# EAGLE board SparkFun_Transceiver_Breakout_RPSMA_Panel_v11 (EAGLE 7.4.0), part 1 of 2
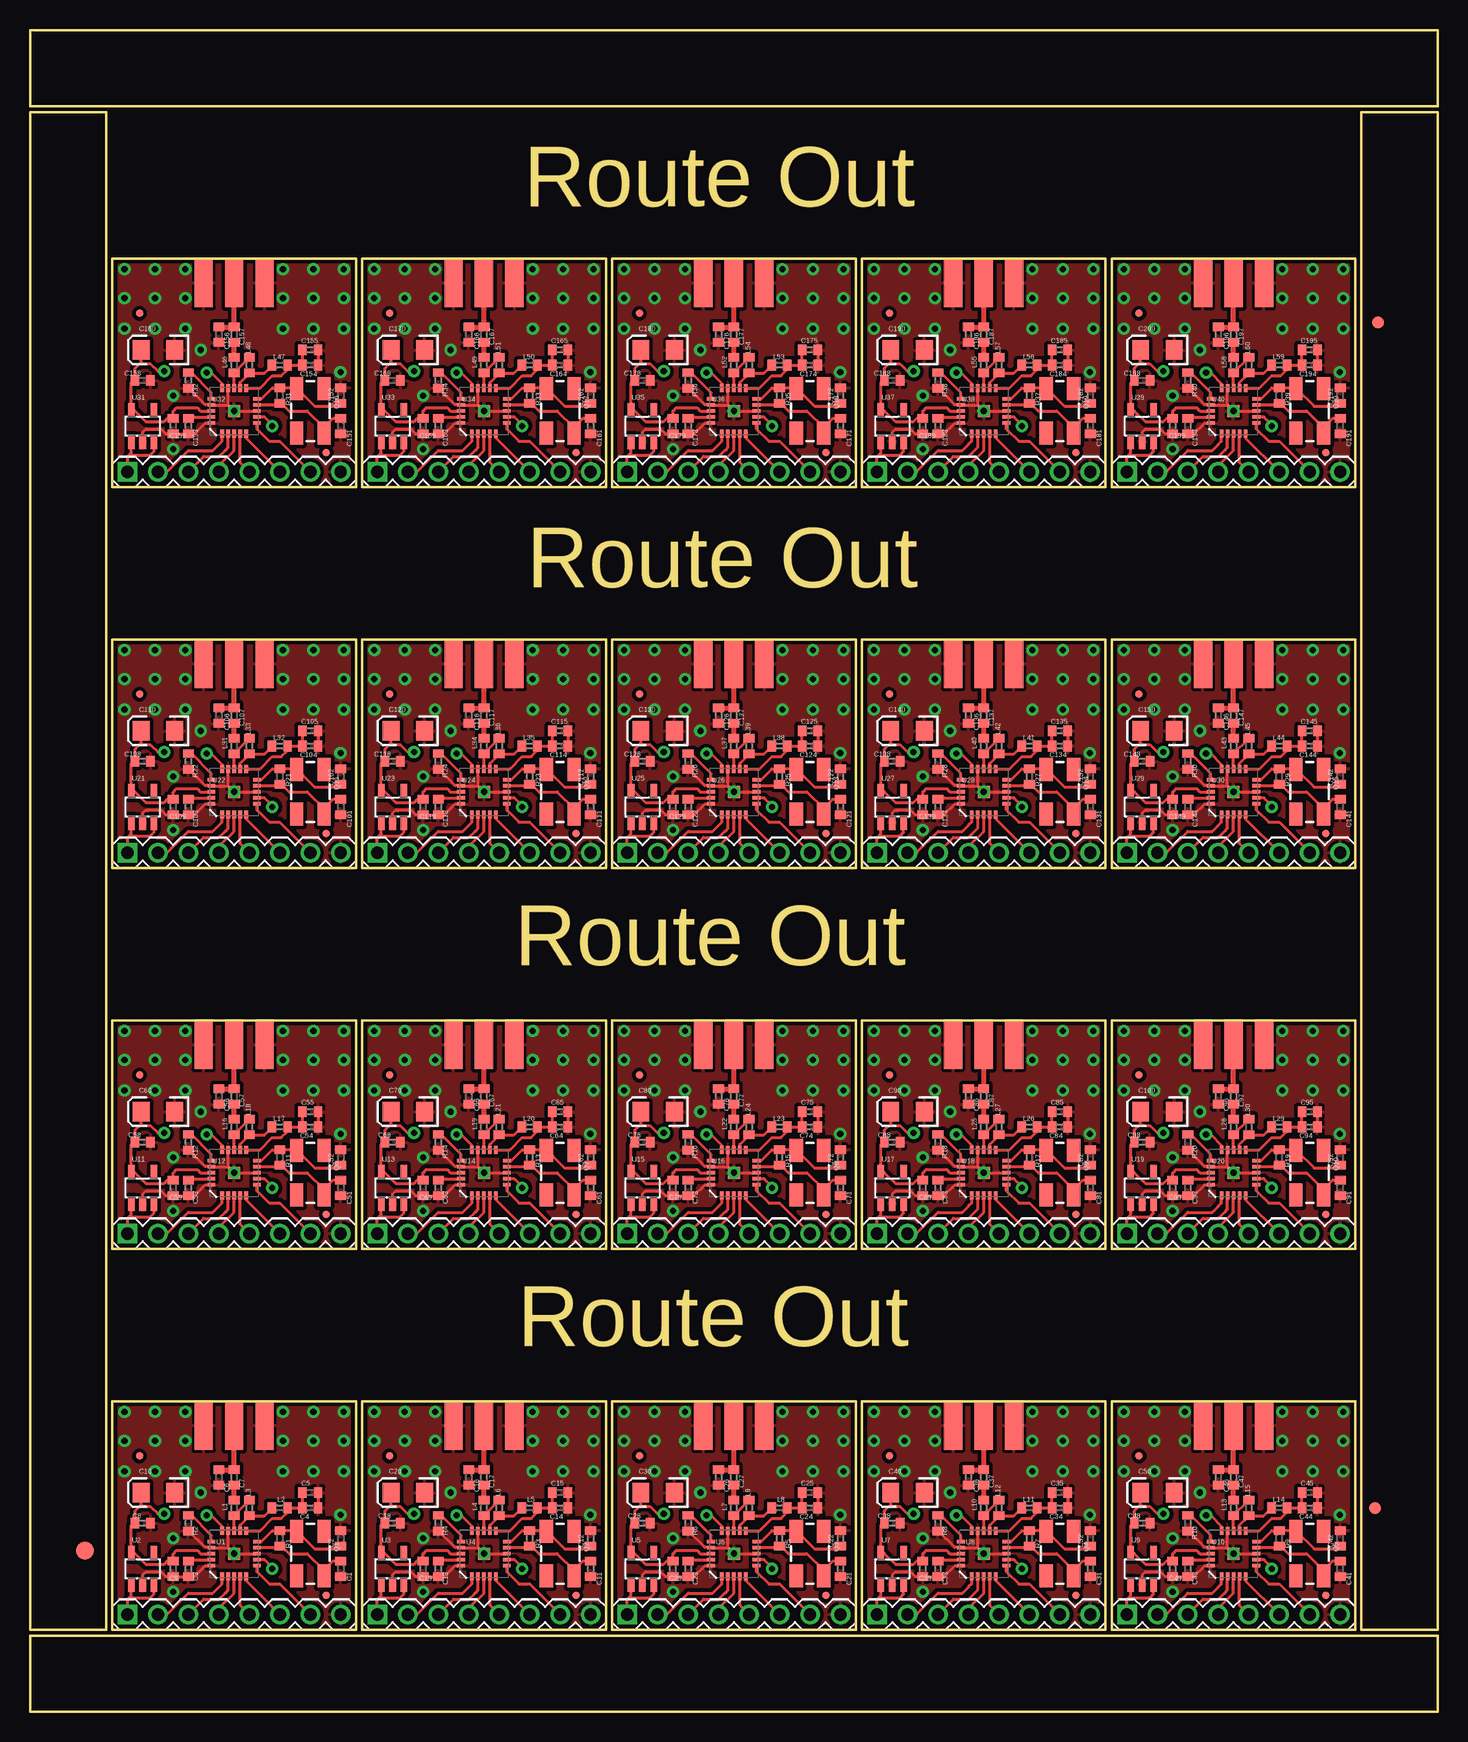
[diagram p0: board, top side]
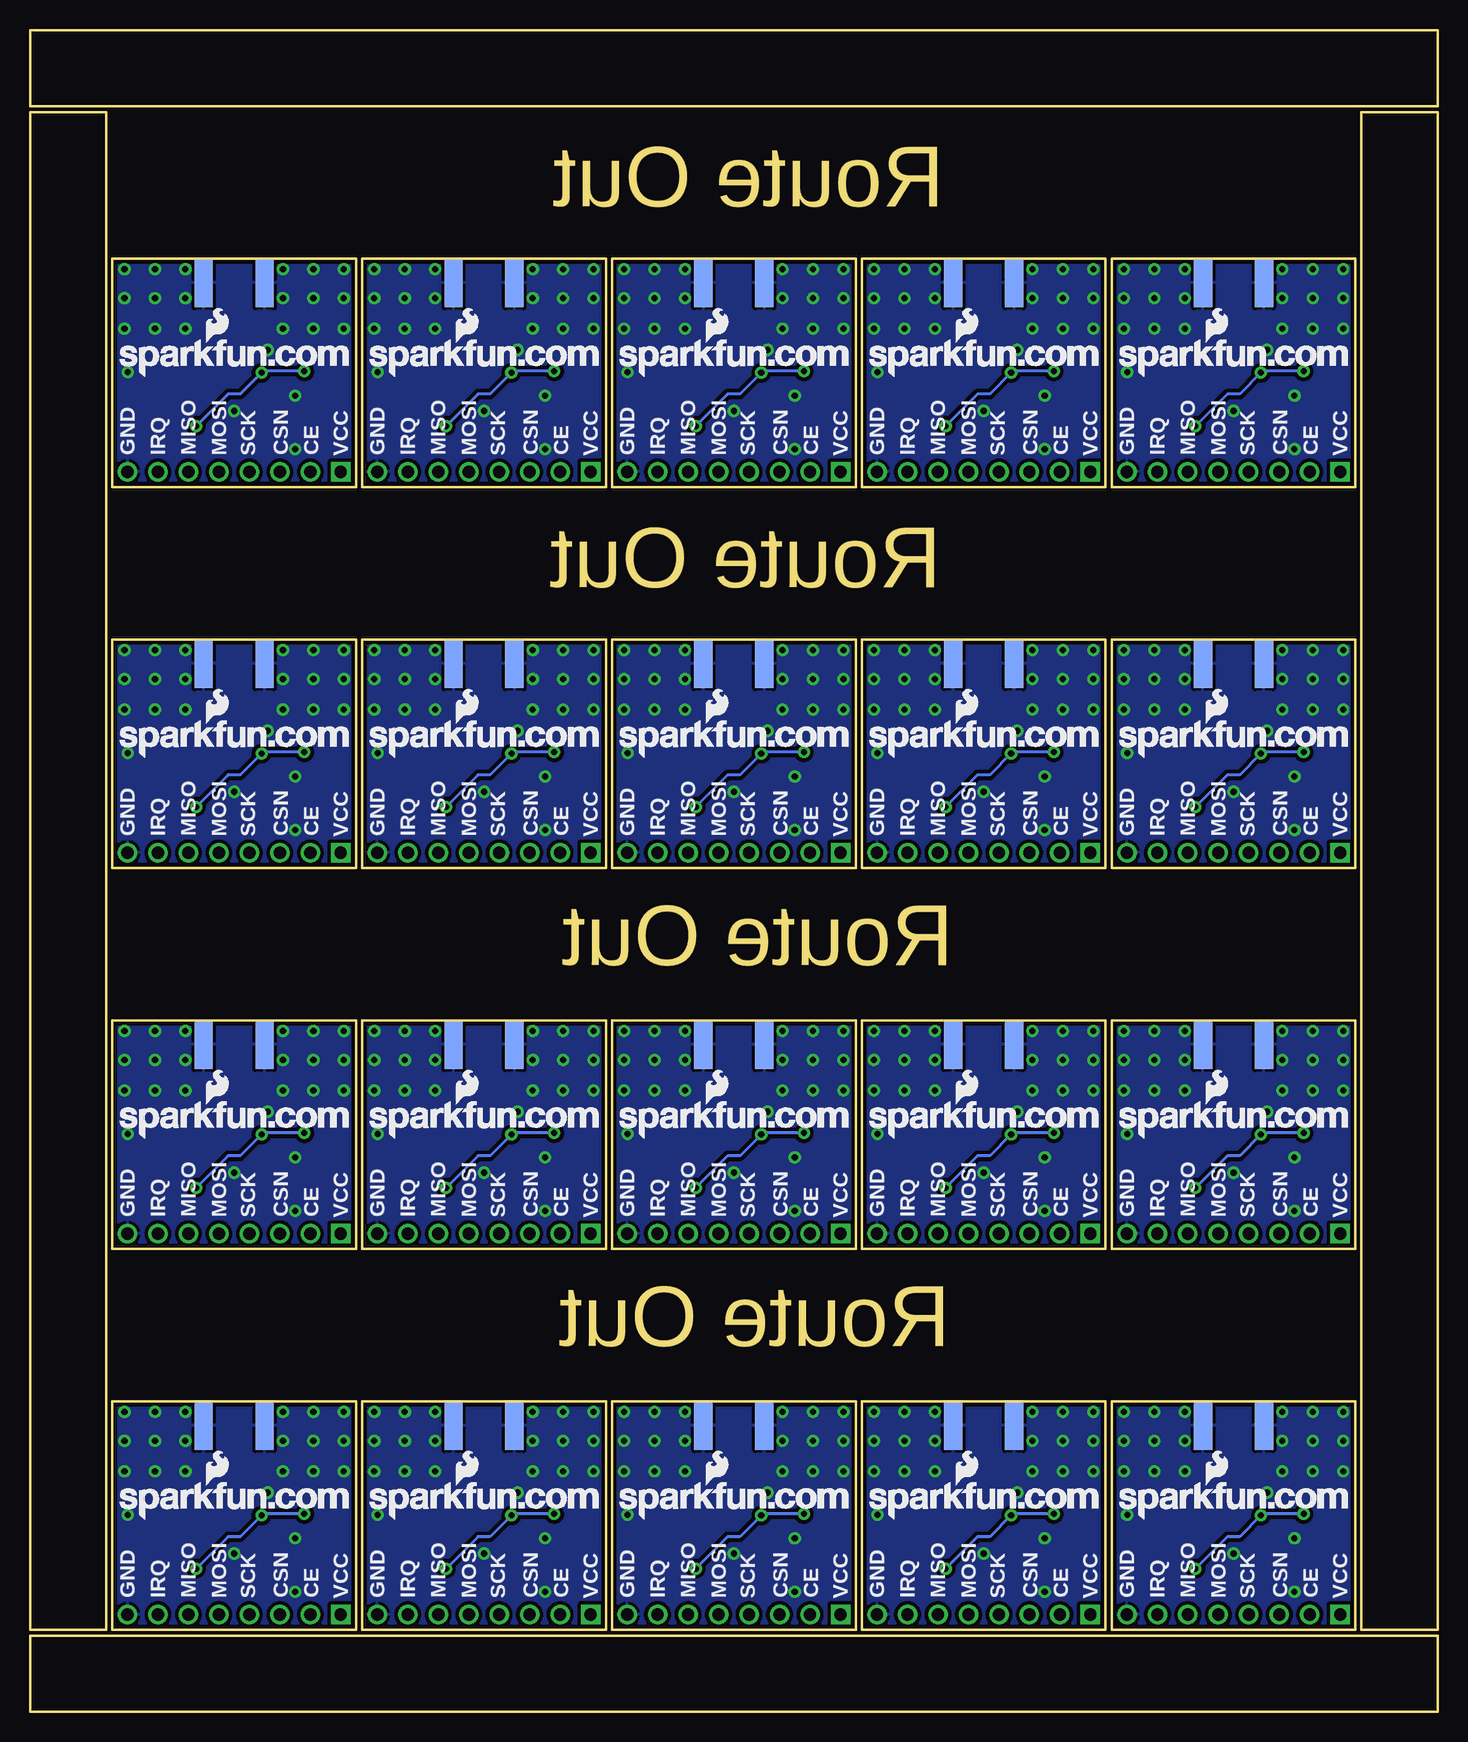
[diagram p1: board, bottom side, seen from below]

Size 117.35 x 140.21 mm. Coordinates in mm from the lower left corner, seen from the top.
Outline: 6.35,79.25 6.35,6.86 0,6.86 0,29.72
Outline: 0,27.18 0,133.35 6.35,133.35 6.35,76.71
Outline: 79.25,0 0,0 0,6.35 29.72,6.35
Outline: 27.18,6.35 117.35,6.35 117.35,0 76.71,0
Outline: 117.35,79.25 117.35,6.86 111,6.86 111,29.72
Outline: 111,27.18 111,133.35 117.35,133.35 117.35,76.71
Outline: 37.34,140.21 117.35,140.21 117.35,133.86 86.87,133.86
Outline: 89.41,133.86 0,133.86 0,140.21 39.88,140.21
Outline: 6.86,6.86 27.18,6.86 27.18,25.91 6.86,25.91 6.86,6.86
Outline: 27.69,6.86 48.01,6.86 48.01,25.91 27.69,25.91 27.69,6.86
Outline: 48.51,6.86 68.83,6.86 68.83,25.91 48.51,25.91 48.51,6.86
Outline: 69.34,6.86 89.66,6.86 89.66,25.91 69.34,25.91 69.34,6.86
Outline: 90.17,6.86 110.49,6.86 110.49,25.91 90.17,25.91 90.17,6.86
Outline: 6.86,38.61 27.18,38.61 27.18,57.66 6.86,57.66 6.86,38.61
Outline: 27.69,38.61 48.01,38.61 48.01,57.66 27.69,57.66 27.69,38.61
Outline: 48.51,38.61 68.83,38.61 68.83,57.66 48.51,57.66 48.51,38.61
Outline: 69.34,38.61 89.66,38.61 89.66,57.66 69.34,57.66 69.34,38.61
Outline: 90.17,38.61 110.49,38.61 110.49,57.66 90.17,57.66 90.17,38.61
Outline: 6.86,70.36 27.18,70.36 27.18,89.41 6.86,89.41 6.86,70.36
Outline: 27.69,70.36 48.01,70.36 48.01,89.41 27.69,89.41 27.69,70.36
Outline: 48.51,70.36 68.83,70.36 68.83,89.41 48.51,89.41 48.51,70.36
Outline: 69.34,70.36 89.66,70.36 89.66,89.41 69.34,89.41 69.34,70.36
Outline: 90.17,70.36 110.49,70.36 110.49,89.41 90.17,89.41 90.17,70.36
Outline: 6.86,102.11 27.18,102.11 27.18,121.16 6.86,121.16 6.86,102.11
Outline: 27.69,102.11 48.01,102.11 48.01,121.16 27.69,121.16 27.69,102.11
Outline: 48.51,102.11 68.83,102.11 68.83,121.16 48.51,121.16 48.51,102.11
Outline: 69.34,102.11 89.66,102.11 89.66,121.16 69.34,121.16 69.34,102.11
Outline: 90.17,102.11 110.49,102.11 110.49,121.16 90.17,121.16 90.17,102.11
Copper layers (1*16): Top 0.035mm / dielectric 1.5mm / Bottom 0.035mm
Design rules "SparkFun *": minimum track width 8mil, minimum drill 20mil, track to track 8mil, track to pad 8mil, pad to pad 7mil, via to via 8mil, smd to smd 8mil, copper to edge 10mil, drill to drill 8mil, minimum pad ring 12mil, minimum via ring 10mil, stop-mask expansion 4mil, vias tented up to drill 25mil, thermal gap 10mil

## Footprints (pad centres in the part's own frame; a part is rotated, then mirrored left to right if it is on the bottom)
C0402 = smd 0.7 x 0.9: 1 -0.65,0; 2 0.65,0
EIA3216 = smd 1.4 x 1.6: A 1.4,0; C -1.4,0
FIDUCIAL-1.5X3 = smd 1.5 x 1.5: 1 0,0
FIDUCIAL-1X2 = smd 1 x 1: 1 0,0
MICRO-FIDUCIAL = smd 0.635 x 0.635: 1 0,0
SMA-EDGE = smd 1.524 x 4.064: GND@0 0,0; GND@1 5.08,0; SIG 2.54,0 | smd 1.524 x 4.064 bottom: GND@2 0,0; GND@3 5.08,0
1X08 = drill 1.016 square: 1 0,0 | drill 1.016: 2 2.54,0; 3 5.08,0; 4 7.62,0; 5 10.16,0; 6 12.7,0; 7 15.24,0; 8 17.78,0
CRYSTAL-SMD-5X3 = smd 1.9 x 1.1: 1 -1.85,-1.15; 2 1.85,-1.15; 3 1.85,1.15; 4 -1.85,1.15
QFN20 = smd 1 x 1: 0 0,0 | smd 0.65 x 0.3: 1 -1.9,1; 2 -1.9,0.5; 3 -1.9,0; 4 -1.9,-0.5; 5 -1.9,-1; 11 1.9,-1; 12 1.9,-0.5; 13 1.9,0; 14 1.9,0.5; 15 1.9,1 | smd 0.3 x 0.65: 6 -1,-1.9; 7 -0.5,-1.9; 8 0,-1.9; 9 0.5,-1.9; 10 1,-1.9; 16 1,1.9; 17 0.5,1.9; 18 0,1.9; 19 -0.5,1.9; 20 -1,1.9
SOT23-5 = smd 0.55 x 1.2: 1 -0.95,-1.3; 2 0,-1.3; 3 0.95,-1.3; 4 0.95,1.3; 5 -0.95,1.3

## Placement (x,y rotation side)
C1  22pF  [C0402]  25.91,11.94 270 top
C2  22pF  [C0402]  25.91,14.48 90 top
C3  33nF  [C0402]  13.21,11.94 270 top
C4  2.2nF  [C0402]  23.37,17.02 0 top
C5  4.7pF  [C0402]  23.37,18.29 0 top
C6  1.0pF  [C0402]  15.75,19.56 90 top
C7  1.5pF  [C0402]  17.02,19.56 90 top
C8  10nF  [C0402]  9.4,15.75 180 top
C9  1nF  [C0402]  11.94,11.94 90 top
C10  10uF  [EIA3216]  10.67,18.29 180 top
C11  22pF  [C0402]  46.74,11.94 270 top
C12  22pF  [C0402]  46.74,14.48 90 top
C13  33nF  [C0402]  34.04,11.94 270 top
C14  2.2nF  [C0402]  44.2,17.02 0 top
C15  4.7pF  [C0402]  44.2,18.29 0 top
C16  1.0pF  [C0402]  36.58,19.56 90 top
C17  1.5pF  [C0402]  37.85,19.56 90 top
C18  10nF  [C0402]  30.23,15.75 180 top
C19  1nF  [C0402]  32.77,11.94 90 top
C20  10uF  [EIA3216]  31.5,18.29 180 top
C21  22pF  [C0402]  67.56,11.94 270 top
C22  22pF  [C0402]  67.56,14.48 90 top
C23  33nF  [C0402]  54.86,11.94 270 top
C24  2.2nF  [C0402]  65.02,17.02 0 top
C25  4.7pF  [C0402]  65.02,18.29 0 top
C26  1.0pF  [C0402]  57.4,19.56 90 top
C27  1.5pF  [C0402]  58.67,19.56 90 top
C28  10nF  [C0402]  51.05,15.75 180 top
C29  1nF  [C0402]  53.59,11.94 90 top
C30  10uF  [EIA3216]  52.32,18.29 180 top
C31  22pF  [C0402]  88.39,11.94 270 top
C32  22pF  [C0402]  88.39,14.48 90 top
C33  33nF  [C0402]  75.69,11.94 270 top
C34  2.2nF  [C0402]  85.85,17.02 0 top
C35  4.7pF  [C0402]  85.85,18.29 0 top
C36  1.0pF  [C0402]  78.23,19.56 90 top
C37  1.5pF  [C0402]  79.5,19.56 90 top
C38  10nF  [C0402]  71.88,15.75 180 top
C39  1nF  [C0402]  74.42,11.94 90 top
C40  10uF  [EIA3216]  73.15,18.29 180 top
C41  22pF  [C0402]  109.22,11.94 270 top
C42  22pF  [C0402]  109.22,14.48 90 top
C43  33nF  [C0402]  96.52,11.94 270 top
C44  2.2nF  [C0402]  106.68,17.02 0 top
C45  4.7pF  [C0402]  106.68,18.29 0 top
C46  1.0pF  [C0402]  99.06,19.56 90 top
C47  1.5pF  [C0402]  100.33,19.56 90 top
C48  10nF  [C0402]  92.71,15.75 180 top
C49  1nF  [C0402]  95.25,11.94 90 top
C50  10uF  [EIA3216]  93.98,18.29 180 top
C51  22pF  [C0402]  25.91,43.69 270 top
C52  22pF  [C0402]  25.91,46.23 90 top
C53  33nF  [C0402]  13.21,43.69 270 top
C54  2.2nF  [C0402]  23.37,48.77 0 top
C55  4.7pF  [C0402]  23.37,50.04 0 top
C56  1.0pF  [C0402]  15.75,51.31 90 top
C57  1.5pF  [C0402]  17.02,51.31 90 top
C58  10nF  [C0402]  9.4,47.5 180 top
C59  1nF  [C0402]  11.94,43.69 90 top
C60  10uF  [EIA3216]  10.67,50.04 180 top
C61  22pF  [C0402]  46.74,43.69 270 top
C62  22pF  [C0402]  46.74,46.23 90 top
C63  33nF  [C0402]  34.04,43.69 270 top
C64  2.2nF  [C0402]  44.2,48.77 0 top
C65  4.7pF  [C0402]  44.2,50.04 0 top
C66  1.0pF  [C0402]  36.58,51.31 90 top
C67  1.5pF  [C0402]  37.85,51.31 90 top
C68  10nF  [C0402]  30.23,47.5 180 top
C69  1nF  [C0402]  32.77,43.69 90 top
C70  10uF  [EIA3216]  31.5,50.04 180 top
C71  22pF  [C0402]  67.56,43.69 270 top
C72  22pF  [C0402]  67.56,46.23 90 top
C73  33nF  [C0402]  54.86,43.69 270 top
C74  2.2nF  [C0402]  65.02,48.77 0 top
C75  4.7pF  [C0402]  65.02,50.04 0 top
C76  1.0pF  [C0402]  57.4,51.31 90 top
C77  1.5pF  [C0402]  58.67,51.31 90 top
C78  10nF  [C0402]  51.05,47.5 180 top
C79  1nF  [C0402]  53.59,43.69 90 top
C80  10uF  [EIA3216]  52.32,50.04 180 top
C81  22pF  [C0402]  88.39,43.69 270 top
C82  22pF  [C0402]  88.39,46.23 90 top
C83  33nF  [C0402]  75.69,43.69 270 top
C84  2.2nF  [C0402]  85.85,48.77 0 top
C85  4.7pF  [C0402]  85.85,50.04 0 top
C86  1.0pF  [C0402]  78.23,51.31 90 top
C87  1.5pF  [C0402]  79.5,51.31 90 top
C88  10nF  [C0402]  71.88,47.5 180 top
C89  1nF  [C0402]  74.42,43.69 90 top
C90  10uF  [EIA3216]  73.15,50.04 180 top
C91  22pF  [C0402]  109.22,43.69 270 top
C92  22pF  [C0402]  109.22,46.23 90 top
C93  33nF  [C0402]  96.52,43.69 270 top
C94  2.2nF  [C0402]  106.68,48.77 0 top
C95  4.7pF  [C0402]  106.68,50.04 0 top
C96  1.0pF  [C0402]  99.06,51.31 90 top
C97  1.5pF  [C0402]  100.33,51.31 90 top
C98  10nF  [C0402]  92.71,47.5 180 top
C99  1nF  [C0402]  95.25,43.69 90 top
C100  10uF  [EIA3216]  93.98,50.04 180 top
C101  22pF  [C0402]  25.91,75.44 270 top
C102  22pF  [C0402]  25.91,77.98 90 top
C103  33nF  [C0402]  13.21,75.44 270 top
C104  2.2nF  [C0402]  23.37,80.52 0 top
C105  4.7pF  [C0402]  23.37,81.79 0 top
C106  1.0pF  [C0402]  15.75,83.06 90 top
C107  1.5pF  [C0402]  17.02,83.06 90 top
C108  10nF  [C0402]  9.4,79.25 180 top
C109  1nF  [C0402]  11.94,75.44 90 top
C110  10uF  [EIA3216]  10.67,81.79 180 top
C111  22pF  [C0402]  46.74,75.44 270 top
C112  22pF  [C0402]  46.74,77.98 90 top
C113  33nF  [C0402]  34.04,75.44 270 top
C114  2.2nF  [C0402]  44.2,80.52 0 top
C115  4.7pF  [C0402]  44.2,81.79 0 top
C116  1.0pF  [C0402]  36.58,83.06 90 top
C117  1.5pF  [C0402]  37.85,83.06 90 top
C118  10nF  [C0402]  30.23,79.25 180 top
C119  1nF  [C0402]  32.77,75.44 90 top
C120  10uF  [EIA3216]  31.5,81.79 180 top
C121  22pF  [C0402]  67.56,75.44 270 top
C122  22pF  [C0402]  67.56,77.98 90 top
C123  33nF  [C0402]  54.86,75.44 270 top
C124  2.2nF  [C0402]  65.02,80.52 0 top
C125  4.7pF  [C0402]  65.02,81.79 0 top
C126  1.0pF  [C0402]  57.4,83.06 90 top
C127  1.5pF  [C0402]  58.67,83.06 90 top
C128  10nF  [C0402]  51.05,79.25 180 top
C129  1nF  [C0402]  53.59,75.44 90 top
C130  10uF  [EIA3216]  52.32,81.79 180 top
C131  22pF  [C0402]  88.39,75.44 270 top
C132  22pF  [C0402]  88.39,77.98 90 top
C133  33nF  [C0402]  75.69,75.44 270 top
C134  2.2nF  [C0402]  85.85,80.52 0 top
C135  4.7pF  [C0402]  85.85,81.79 0 top
C136  1.0pF  [C0402]  78.23,83.06 90 top
C137  1.5pF  [C0402]  79.5,83.06 90 top
C138  10nF  [C0402]  71.88,79.25 180 top
C139  1nF  [C0402]  74.42,75.44 90 top
C140  10uF  [EIA3216]  73.15,81.79 180 top
C141  22pF  [C0402]  109.22,75.44 270 top
C142  22pF  [C0402]  109.22,77.98 90 top
C143  33nF  [C0402]  96.52,75.44 270 top
C144  2.2nF  [C0402]  106.68,80.52 0 top
C145  4.7pF  [C0402]  106.68,81.79 0 top
C146  1.0pF  [C0402]  99.06,83.06 90 top
C147  1.5pF  [C0402]  100.33,83.06 90 top
C148  10nF  [C0402]  92.71,79.25 180 top
C149  1nF  [C0402]  95.25,75.44 90 top
C150  10uF  [EIA3216]  93.98,81.79 180 top
C151  22pF  [C0402]  25.91,107.19 270 top
C152  22pF  [C0402]  25.91,109.73 90 top
C153  33nF  [C0402]  13.21,107.19 270 top
C154  2.2nF  [C0402]  23.37,112.27 0 top
C155  4.7pF  [C0402]  23.37,113.54 0 top
C156  1.0pF  [C0402]  15.75,114.81 90 top
C157  1.5pF  [C0402]  17.02,114.81 90 top
C158  10nF  [C0402]  9.4,111 180 top
C159  1nF  [C0402]  11.94,107.19 90 top
C160  10uF  [EIA3216]  10.67,113.54 180 top
C161  22pF  [C0402]  46.74,107.19 270 top
C162  22pF  [C0402]  46.74,109.73 90 top
C163  33nF  [C0402]  34.04,107.19 270 top
C164  2.2nF  [C0402]  44.2,112.27 0 top
C165  4.7pF  [C0402]  44.2,113.54 0 top
C166  1.0pF  [C0402]  36.58,114.81 90 top
C167  1.5pF  [C0402]  37.85,114.81 90 top
C168  10nF  [C0402]  30.23,111 180 top
C169  1nF  [C0402]  32.77,107.19 90 top
C170  10uF  [EIA3216]  31.5,113.54 180 top
C171  22pF  [C0402]  67.56,107.19 270 top
C172  22pF  [C0402]  67.56,109.73 90 top
C173  33nF  [C0402]  54.86,107.19 270 top
C174  2.2nF  [C0402]  65.02,112.27 0 top
C175  4.7pF  [C0402]  65.02,113.54 0 top
C176  1.0pF  [C0402]  57.4,114.81 90 top
C177  1.5pF  [C0402]  58.67,114.81 90 top
C178  10nF  [C0402]  51.05,111 180 top
C179  1nF  [C0402]  53.59,107.19 90 top
C180  10uF  [EIA3216]  52.32,113.54 180 top
C181  22pF  [C0402]  88.39,107.19 270 top
C182  22pF  [C0402]  88.39,109.73 90 top
C183  33nF  [C0402]  75.69,107.19 270 top
C184  2.2nF  [C0402]  85.85,112.27 0 top
C185  4.7pF  [C0402]  85.85,113.54 0 top
C186  1.0pF  [C0402]  78.23,114.81 90 top
C187  1.5pF  [C0402]  79.5,114.81 90 top
C188  10nF  [C0402]  71.88,111 180 top
C189  1nF  [C0402]  74.42,107.19 90 top
C190  10uF  [EIA3216]  73.15,113.54 180 top
C191  22pF  [C0402]  109.22,107.19 270 top
C192  22pF  [C0402]  109.22,109.73 90 top
C193  33nF  [C0402]  96.52,107.19 270 top
C194  2.2nF  [C0402]  106.68,112.27 0 top
C195  4.7pF  [C0402]  106.68,113.54 0 top
C196  1.0pF  [C0402]  99.06,114.81 90 top
C197  1.5pF  [C0402]  100.33,114.81 90 top
C198  10nF  [C0402]  92.71,111 180 top
C199  1nF  [C0402]  95.25,107.19 90 top
C200  10uF  [EIA3216]  93.98,113.54 180 top
E$1  [FIDUCIAL-1.5X3]  4.57,13.46 0 top
E$5  [FIDUCIAL-1X2]  112.14,17.02 0 top
E$6  [FIDUCIAL-1X2]  112.39,115.82 180 top
FID1  FIDUCIALUFIDUCIAL  [MICRO-FIDUCIAL]  24.69,9.73 0 top
FID2  FIDUCIALUFIDUCIAL  [MICRO-FIDUCIAL]  9.14,21.34 0 top
FID3  FIDUCIALUFIDUCIAL  [MICRO-FIDUCIAL]  45.52,9.73 0 top
FID4  FIDUCIALUFIDUCIAL  [MICRO-FIDUCIAL]  29.97,21.34 0 top
FID5  FIDUCIALUFIDUCIAL  [MICRO-FIDUCIAL]  66.34,9.73 0 top
FID6  FIDUCIALUFIDUCIAL  [MICRO-FIDUCIAL]  50.8,21.34 0 top
FID7  FIDUCIALUFIDUCIAL  [MICRO-FIDUCIAL]  87.17,9.73 0 top
FID8  FIDUCIALUFIDUCIAL  [MICRO-FIDUCIAL]  71.63,21.34 0 top
FID9  FIDUCIALUFIDUCIAL  [MICRO-FIDUCIAL]  108,9.73 0 top
FID10  FIDUCIALUFIDUCIAL  [MICRO-FIDUCIAL]  92.46,21.34 0 top
FID11  FIDUCIALUFIDUCIAL  [MICRO-FIDUCIAL]  24.69,41.48 0 top
FID12  FIDUCIALUFIDUCIAL  [MICRO-FIDUCIAL]  9.14,53.09 0 top
FID13  FIDUCIALUFIDUCIAL  [MICRO-FIDUCIAL]  45.52,41.48 0 top
FID14  FIDUCIALUFIDUCIAL  [MICRO-FIDUCIAL]  29.97,53.09 0 top
FID15  FIDUCIALUFIDUCIAL  [MICRO-FIDUCIAL]  66.34,41.48 0 top
FID16  FIDUCIALUFIDUCIAL  [MICRO-FIDUCIAL]  50.8,53.09 0 top
FID17  FIDUCIALUFIDUCIAL  [MICRO-FIDUCIAL]  87.17,41.48 0 top
FID18  FIDUCIALUFIDUCIAL  [MICRO-FIDUCIAL]  71.63,53.09 0 top
FID19  FIDUCIALUFIDUCIAL  [MICRO-FIDUCIAL]  108,41.48 0 top
FID20  FIDUCIALUFIDUCIAL  [MICRO-FIDUCIAL]  92.46,53.09 0 top
FID21  FIDUCIALUFIDUCIAL  [MICRO-FIDUCIAL]  24.69,73.23 0 top
FID22  FIDUCIALUFIDUCIAL  [MICRO-FIDUCIAL]  9.14,84.84 0 top
FID23  FIDUCIALUFIDUCIAL  [MICRO-FIDUCIAL]  45.52,73.23 0 top
FID24  FIDUCIALUFIDUCIAL  [MICRO-FIDUCIAL]  29.97,84.84 0 top
FID25  FIDUCIALUFIDUCIAL  [MICRO-FIDUCIAL]  66.34,73.23 0 top
FID26  FIDUCIALUFIDUCIAL  [MICRO-FIDUCIAL]  50.8,84.84 0 top
FID27  FIDUCIALUFIDUCIAL  [MICRO-FIDUCIAL]  87.17,73.23 0 top
FID28  FIDUCIALUFIDUCIAL  [MICRO-FIDUCIAL]  71.63,84.84 0 top
FID29  FIDUCIALUFIDUCIAL  [MICRO-FIDUCIAL]  108,73.23 0 top
FID30  FIDUCIALUFIDUCIAL  [MICRO-FIDUCIAL]  92.46,84.84 0 top
FID31  FIDUCIALUFIDUCIAL  [MICRO-FIDUCIAL]  24.69,104.98 0 top
FID32  FIDUCIALUFIDUCIAL  [MICRO-FIDUCIAL]  9.14,116.59 0 top
FID33  FIDUCIALUFIDUCIAL  [MICRO-FIDUCIAL]  45.52,104.98 0 top
FID34  FIDUCIALUFIDUCIAL  [MICRO-FIDUCIAL]  29.97,116.59 0 top
FID35  FIDUCIALUFIDUCIAL  [MICRO-FIDUCIAL]  66.34,104.98 0 top
FID36  FIDUCIALUFIDUCIAL  [MICRO-FIDUCIAL]  50.8,116.59 0 top
FID37  FIDUCIALUFIDUCIAL  [MICRO-FIDUCIAL]  87.17,104.98 0 top
FID38  FIDUCIALUFIDUCIAL  [MICRO-FIDUCIAL]  71.63,116.59 0 top
FID39  FIDUCIALUFIDUCIAL  [MICRO-FIDUCIAL]  108,104.98 0 top
FID40  FIDUCIALUFIDUCIAL  [MICRO-FIDUCIAL]  92.46,116.59 0 top
J$1  SMA_EDGE  [SMA-EDGE]  19.56,23.88 180 top
J$2  SMA_EDGE  [SMA-EDGE]  40.39,23.88 180 top
J$3  SMA_EDGE  [SMA-EDGE]  61.21,23.88 180 top
J$4  SMA_EDGE  [SMA-EDGE]  82.04,23.88 180 top
J$5  SMA_EDGE  [SMA-EDGE]  102.87,23.88 180 top
J$6  SMA_EDGE  [SMA-EDGE]  19.56,55.63 180 top
J$7  SMA_EDGE  [SMA-EDGE]  40.39,55.63 180 top
J$8  SMA_EDGE  [SMA-EDGE]  61.21,55.63 180 top
J$9  SMA_EDGE  [SMA-EDGE]  82.04,55.63 180 top
J$10  SMA_EDGE  [SMA-EDGE]  102.87,55.63 180 top
J$11  SMA_EDGE  [SMA-EDGE]  19.56,87.38 180 top
J$12  SMA_EDGE  [SMA-EDGE]  40.39,87.38 180 top
J$13  SMA_EDGE  [SMA-EDGE]  61.21,87.38 180 top
J$14  SMA_EDGE  [SMA-EDGE]  82.04,87.38 180 top
J$15  SMA_EDGE  [SMA-EDGE]  102.87,87.38 180 top
J$16  SMA_EDGE  [SMA-EDGE]  19.56,119.13 180 top
J$17  SMA_EDGE  [SMA-EDGE]  40.39,119.13 180 top
J$18  SMA_EDGE  [SMA-EDGE]  61.21,119.13 180 top
J$19  SMA_EDGE  [SMA-EDGE]  82.04,119.13 180 top
J$20  SMA_EDGE  [SMA-EDGE]  102.87,119.13 180 top
JP1  [1X08]  8.13,8.13 0 top
JP2  [1X08]  28.96,8.13 0 top
JP3  [1X08]  49.78,8.13 0 top
JP4  [1X08]  70.61,8.13 0 top
JP5  [1X08]  91.44,8.13 0 top
JP6  [1X08]  8.13,39.88 0 top
JP7  [1X08]  28.96,39.88 0 top
JP8  [1X08]  49.78,39.88 0 top
JP9  [1X08]  70.61,39.88 0 top
JP10  [1X08]  91.44,39.88 0 top
JP11  [1X08]  8.13,71.63 0 top
JP12  [1X08]  28.96,71.63 0 top
JP13  [1X08]  49.78,71.63 0 top
JP14  [1X08]  70.61,71.63 0 top
JP15  [1X08]  91.44,71.63 0 top
JP16  [1X08]  8.13,103.38 0 top
JP17  [1X08]  28.96,103.38 0 top
JP18  [1X08]  49.78,103.38 0 top
JP19  [1X08]  70.61,103.38 0 top
JP20  [1X08]  91.44,103.38 0 top
L1  3.9nH  [C0402]  17.02,17.02 90 top
L2  2.7nH  [C0402]  20.83,17.02 180 top
L3  8.2nH  [C0402]  18.29,17.02 90 top
L4  3.9nH  [C0402]  37.85,17.02 90 top
L5  2.7nH  [C0402]  41.66,17.02 180 top
L6  8.2nH  [C0402]  39.12,17.02 90 top
L7  3.9nH  [C0402]  58.67,17.02 90 top
L8  2.7nH  [C0402]  62.48,17.02 180 top
L9  8.2nH  [C0402]  59.94,17.02 90 top
L10  3.9nH  [C0402]  79.5,17.02 90 top
L11  2.7nH  [C0402]  83.31,17.02 180 top
L12  8.2nH  [C0402]  80.77,17.02 90 top
L13  3.9nH  [C0402]  100.33,17.02 90 top
L14  2.7nH  [C0402]  104.14,17.02 180 top
L15  8.2nH  [C0402]  101.6,17.02 90 top
L16  3.9nH  [C0402]  17.02,48.77 90 top
L17  2.7nH  [C0402]  20.83,48.77 180 top
L18  8.2nH  [C0402]  18.29,48.77 90 top
L19  3.9nH  [C0402]  37.85,48.77 90 top
L20  2.7nH  [C0402]  41.66,48.77 180 top
L21  8.2nH  [C0402]  39.12,48.77 90 top
L22  3.9nH  [C0402]  58.67,48.77 90 top
L23  2.7nH  [C0402]  62.48,48.77 180 top
L24  8.2nH  [C0402]  59.94,48.77 90 top
L25  3.9nH  [C0402]  79.5,48.77 90 top
L26  2.7nH  [C0402]  83.31,48.77 180 top
L27  8.2nH  [C0402]  80.77,48.77 90 top
L28  3.9nH  [C0402]  100.33,48.77 90 top
L29  2.7nH  [C0402]  104.14,48.77 180 top
L30  8.2nH  [C0402]  101.6,48.77 90 top
L31  3.9nH  [C0402]  17.02,80.52 90 top
L32  2.7nH  [C0402]  20.83,80.52 180 top
L33  8.2nH  [C0402]  18.29,80.52 90 top
L34  3.9nH  [C0402]  37.85,80.52 90 top
L35  2.7nH  [C0402]  41.66,80.52 180 top
L36  8.2nH  [C0402]  39.12,80.52 90 top
L37  3.9nH  [C0402]  58.67,80.52 90 top
L38  2.7nH  [C0402]  62.48,80.52 180 top
L39  8.2nH  [C0402]  59.94,80.52 90 top
L40  3.9nH  [C0402]  79.5,80.52 90 top
L41  2.7nH  [C0402]  83.31,80.52 180 top
L42  8.2nH  [C0402]  80.77,80.52 90 top
L43  3.9nH  [C0402]  100.33,80.52 90 top
L44  2.7nH  [C0402]  104.14,80.52 180 top
L45  8.2nH  [C0402]  101.6,80.52 90 top
L46  3.9nH  [C0402]  17.02,112.27 90 top
L47  2.7nH  [C0402]  20.83,112.27 180 top
L48  8.2nH  [C0402]  18.29,112.27 90 top
L49  3.9nH  [C0402]  37.85,112.27 90 top
L50  2.7nH  [C0402]  41.66,112.27 180 top
L51  8.2nH  [C0402]  39.12,112.27 90 top
L52  3.9nH  [C0402]  58.67,112.27 90 top
L53  2.7nH  [C0402]  62.48,112.27 180 top
L54  8.2nH  [C0402]  59.94,112.27 90 top
L55  3.9nH  [C0402]  79.5,112.27 90 top
L56  2.7nH  [C0402]  83.31,112.27 180 top
L57  8.2nH  [C0402]  80.77,112.27 90 top
L58  3.9nH  [C0402]  100.33,112.27 90 top
L59  2.7nH  [C0402]  104.14,112.27 180 top
L60  8.2nH  [C0402]  101.6,112.27 90 top
Q1  16MHz  [CRYSTAL-SMD-5X3]  23.37,13.21 90 top
Q2  16MHz  [CRYSTAL-SMD-5X3]  44.2,13.21 90 top
Q3  16MHz  [CRYSTAL-SMD-5X3]  65.02,13.21 90 top
Q4  16MHz  [CRYSTAL-SMD-5X3]  85.85,13.21 90 top
Q5  16MHz  [CRYSTAL-SMD-5X3]  106.68,13.21 90 top
Q6  16MHz  [CRYSTAL-SMD-5X3]  23.37,44.96 90 top
Q7  16MHz  [CRYSTAL-SMD-5X3]  44.2,44.96 90 top
Q8  16MHz  [CRYSTAL-SMD-5X3]  65.02,44.96 90 top
Q9  16MHz  [CRYSTAL-SMD-5X3]  85.85,44.96 90 top
Q10  16MHz  [CRYSTAL-SMD-5X3]  106.68,44.96 90 top
Q11  16MHz  [CRYSTAL-SMD-5X3]  23.37,76.71 90 top
Q12  16MHz  [CRYSTAL-SMD-5X3]  44.2,76.71 90 top
Q13  16MHz  [CRYSTAL-SMD-5X3]  65.02,76.71 90 top
Q14  16MHz  [CRYSTAL-SMD-5X3]  85.85,76.71 90 top
Q15  16MHz  [CRYSTAL-SMD-5X3]  106.68,76.71 90 top
Q16  16MHz  [CRYSTAL-SMD-5X3]  23.37,108.46 90 top
Q17  16MHz  [CRYSTAL-SMD-5X3]  44.2,108.46 90 top
Q18  16MHz  [CRYSTAL-SMD-5X3]  65.02,108.46 90 top
Q19  16MHz  [CRYSTAL-SMD-5X3]  85.85,108.46 90 top
Q20  16MHz  [CRYSTAL-SMD-5X3]  106.68,108.46 90 top
R1  1M  [C0402]  20.83,14.48 90 top
R2  22K  [C0402]  13.21,15.75 270 top
R3  1M  [C0402]  41.66,14.48 90 top
R4  22K  [C0402]  34.04,15.75 270 top
R5  1M  [C0402]  62.48,14.48 90 top
R6  22K  [C0402]  54.86,15.75 270 top
R7  1M  [C0402]  83.31,14.48 90 top
R8  22K  [C0402]  75.69,15.75 270 top
R9  1M  [C0402]  104.14,14.48 90 top
R10  22K  [C0402]  96.52,15.75 270 top
R11  1M  [C0402]  20.83,46.23 90 top
R12  22K  [C0402]  13.21,47.5 270 top
R13  1M  [C0402]  41.66,46.23 90 top
R14  22K  [C0402]  34.04,47.5 270 top
R15  1M  [C0402]  62.48,46.23 90 top
R16  22K  [C0402]  54.86,47.5 270 top
R17  1M  [C0402]  83.31,46.23 90 top
R18  22K  [C0402]  75.69,47.5 270 top
R19  1M  [C0402]  104.14,46.23 90 top
R20  22K  [C0402]  96.52,47.5 270 top
R21  1M  [C0402]  20.83,77.98 90 top
R22  22K  [C0402]  13.21,79.25 270 top
R23  1M  [C0402]  41.66,77.98 90 top
R24  22K  [C0402]  34.04,79.25 270 top
R25  1M  [C0402]  62.48,77.98 90 top
R26  22K  [C0402]  54.86,79.25 270 top
R27  1M  [C0402]  83.31,77.98 90 top
R28  22K  [C0402]  75.69,79.25 270 top
R29  1M  [C0402]  104.14,77.98 90 top
R30  22K  [C0402]  96.52,79.25 270 top
R31  1M  [C0402]  20.83,109.73 90 top
R32  22K  [C0402]  13.21,111 270 top
R33  1M  [C0402]  41.66,109.73 90 top
R34  22K  [C0402]  34.04,111 270 top
R35  1M  [C0402]  62.48,109.73 90 top
R36  22K  [C0402]  54.86,111 270 top
R37  1M  [C0402]  83.31,109.73 90 top
R38  22K  [C0402]  75.69,111 270 top
R39  1M  [C0402]  104.14,109.73 90 top
R40  22K  [C0402]  96.52,111 270 top
U1  NRF24L01SMD  [QFN20]  17.02,13.21 90 top
U2  V_REG_LDOSMD  [SOT23-5]  9.4,11.94 0 top
U3  V_REG_LDOSMD  [SOT23-5]  30.23,11.94 0 top
U4  NRF24L01SMD  [QFN20]  37.85,13.21 90 top
U5  V_REG_LDOSMD  [SOT23-5]  51.05,11.94 0 top
U6  NRF24L01SMD  [QFN20]  58.67,13.21 90 top
U7  V_REG_LDOSMD  [SOT23-5]  71.88,11.94 0 top
U8  NRF24L01SMD  [QFN20]  79.5,13.21 90 top
U9  V_REG_LDOSMD  [SOT23-5]  92.71,11.94 0 top
U10  NRF24L01SMD  [QFN20]  100.33,13.21 90 top
U11  V_REG_LDOSMD  [SOT23-5]  9.4,43.69 0 top
U12  NRF24L01SMD  [QFN20]  17.02,44.96 90 top
U13  V_REG_LDOSMD  [SOT23-5]  30.23,43.69 0 top
U14  NRF24L01SMD  [QFN20]  37.85,44.96 90 top
U15  V_REG_LDOSMD  [SOT23-5]  51.05,43.69 0 top
U16  NRF24L01SMD  [QFN20]  58.67,44.96 90 top
U17  V_REG_LDOSMD  [SOT23-5]  71.88,43.69 0 top
U18  NRF24L01SMD  [QFN20]  79.5,44.96 90 top
U19  V_REG_LDOSMD  [SOT23-5]  92.71,43.69 0 top
U20  NRF24L01SMD  [QFN20]  100.33,44.96 90 top
U21  V_REG_LDOSMD  [SOT23-5]  9.4,75.44 0 top
U22  NRF24L01SMD  [QFN20]  17.02,76.71 90 top
U23  V_REG_LDOSMD  [SOT23-5]  30.23,75.44 0 top
U24  NRF24L01SMD  [QFN20]  37.85,76.71 90 top
U25  V_REG_LDOSMD  [SOT23-5]  51.05,75.44 0 top
U26  NRF24L01SMD  [QFN20]  58.67,76.71 90 top
U27  V_REG_LDOSMD  [SOT23-5]  71.88,75.44 0 top
U28  NRF24L01SMD  [QFN20]  79.5,76.71 90 top
U29  V_REG_LDOSMD  [SOT23-5]  92.71,75.44 0 top
U30  NRF24L01SMD  [QFN20]  100.33,76.71 90 top
U31  V_REG_LDOSMD  [SOT23-5]  9.4,107.19 0 top
U32  NRF24L01SMD  [QFN20]  17.02,108.46 90 top
U33  V_REG_LDOSMD  [SOT23-5]  30.23,107.19 0 top
U34  NRF24L01SMD  [QFN20]  37.85,108.46 90 top
U35  V_REG_LDOSMD  [SOT23-5]  51.05,107.19 0 top
U36  NRF24L01SMD  [QFN20]  58.67,108.46 90 top
U37  V_REG_LDOSMD  [SOT23-5]  71.88,107.19 0 top
U38  NRF24L01SMD  [QFN20]  79.5,108.46 90 top
U39  V_REG_LDOSMD  [SOT23-5]  92.71,107.19 0 top
U40  NRF24L01SMD  [QFN20]  100.33,108.46 90 top
U$1  LOGO-SFENEW  [SFE-NEW-WEBLOGO]  47.38,16.03 0 bottom
U$2  LOGO-SFENEW  [SFE-NEW-WEBLOGO]  68.21,16.03 0 bottom
U$3  LOGO-SFENEW  [SFE-NEW-WEBLOGO]  89.04,16.03 0 bottom
U$4  LOGO-SFENEW  [SFE-NEW-WEBLOGO]  109.87,16.03 0 bottom
U$5  LOGO-SFENEW  [SFE-NEW-WEBLOGO]  26.56,16.03 0 bottom
U$6  LOGO-SFENEW  [SFE-NEW-WEBLOGO]  26.56,47.78 0 bottom
U$7  LOGO-SFENEW  [SFE-NEW-WEBLOGO]  47.38,47.78 0 bottom
U$8  LOGO-SFENEW  [SFE-NEW-WEBLOGO]  68.21,47.78 0 bottom
U$9  LOGO-SFENEW  [SFE-NEW-WEBLOGO]  89.04,47.78 0 bottom
U$10  LOGO-SFENEW  [SFE-NEW-WEBLOGO]  109.87,47.78 0 bottom
U$11  LOGO-SFENEW  [SFE-NEW-WEBLOGO]  26.56,79.53 0 bottom
U$12  LOGO-SFENEW  [SFE-NEW-WEBLOGO]  47.38,79.53 0 bottom
U$13  LOGO-SFENEW  [SFE-NEW-WEBLOGO]  68.21,79.53 0 bottom
U$14  LOGO-SFENEW  [SFE-NEW-WEBLOGO]  89.04,79.53 0 bottom
U$15  LOGO-SFENEW  [SFE-NEW-WEBLOGO]  109.87,79.53 0 bottom
U$16  LOGO-SFENEW  [SFE-NEW-WEBLOGO]  26.56,111.28 0 bottom
U$17  LOGO-SFENEW  [SFE-NEW-WEBLOGO]  47.38,111.28 0 bottom
U$18  LOGO-SFENEW  [SFE-NEW-WEBLOGO]  68.21,111.28 0 bottom
U$19  LOGO-SFENEW  [SFE-NEW-WEBLOGO]  89.04,111.28 0 bottom
U$20  LOGO-SFENEW  [SFE-NEW-WEBLOGO]  109.87,111.28 0 bottom

## Library data of the parts
C1-C200 J$1-J$20 JP1-JP20 L1-L60 Q1-Q20 R1-R40 U1-U40 U$1-U$20 = SparkFun
E$1 = SparkFun-Retired
E$5 E$6 FID1-FID40 = SparkFun-Aesthetics

## Nets
ANT: C6.2 C7.2 J$1.SIG
ANT1: C16.2 C17.2 J$2.SIG
ANT2: C26.2 C27.2 J$3.SIG
ANT3: C36.2 C37.2 J$4.SIG
ANT4: C46.2 C47.2 J$5.SIG
ANT5: C56.2 C57.2 J$6.SIG
ANT6: C66.2 C67.2 J$7.SIG
ANT7: C76.2 C77.2 J$8.SIG
ANT8: C86.2 C87.2 J$9.SIG
ANT9: C96.2 C97.2 J$10.SIG
ANT10: C106.2 C107.2 J$11.SIG
ANT11: C116.2 C117.2 J$12.SIG
ANT12: C126.2 C127.2 J$13.SIG
ANT13: C136.2 C137.2 J$14.SIG
ANT14: C146.2 C147.2 J$15.SIG
ANT15: C156.2 C157.2 J$16.SIG
ANT16: C166.2 C167.2 J$17.SIG
ANT17: C176.2 C177.2 J$18.SIG
ANT18: C186.2 C187.2 J$19.SIG
ANT19: C196.2 C197.2 J$20.SIG
CE: JP1.2 U1.1
CE1: JP2.2 U4.1
CE2: JP3.2 U6.1
CE3: JP4.2 U8.1
CE4: JP5.2 U10.1
CE5: JP6.2 U12.1
CE6: JP7.2 U14.1
CE7: JP8.2 U16.1
CE8: JP9.2 U18.1
CE9: JP10.2 U20.1
CE10: JP11.2 U22.1
CE11: JP12.2 U24.1
CE12: JP13.2 U26.1
CE13: JP14.2 U28.1
CE14: JP15.2 U30.1
CE15: JP16.2 U32.1
CE16: JP17.2 U34.1
CE17: JP18.2 U36.1
CE18: JP19.2 U38.1
CE19: JP20.2 U40.1
CSN: JP1.3 U1.2
CSN1: JP2.3 U4.2
CSN2: JP3.3 U6.2
CSN3: JP4.3 U8.2
CSN4: JP5.3 U10.2
CSN5: JP6.3 U12.2
CSN6: JP7.3 U14.2
CSN7: JP8.3 U16.2
CSN8: JP9.3 U18.2
CSN9: JP10.3 U20.2
CSN10: JP11.3 U22.2
CSN11: JP12.3 U24.2
CSN12: JP13.3 U26.2
CSN13: JP14.3 U28.2
CSN14: JP15.3 U30.2
CSN15: JP16.3 U32.2
CSN16: JP17.3 U34.2
CSN17: JP18.3 U36.2
CSN18: JP19.3 U38.2
CSN19: JP20.3 U40.2
GND: C1.2 C2.2 C3.2 C4.2 C5.2 C6.1 C8.1 C9.1 C10.C J$1.GND@0 J$1.GND@1 J$1.GND@2 J$1.GND@3 JP1.8 R2.2 U1.0 U1.8 U1.14 U1.17 U1.20 U2.2
GND1: C11.2 C12.2 C13.2 C14.2 C15.2 C16.1 C18.1 C19.1 C20.C J$2.GND@0 J$2.GND@1 J$2.GND@2 J$2.GND@3 JP2.8 R4.2 U3.2 U4.0 U4.8 U4.14 U4.17 U4.20
GND2: C21.2 C22.2 C23.2 C24.2 C25.2 C26.1 C28.1 C29.1 C30.C J$3.GND@0 J$3.GND@1 J$3.GND@2 J$3.GND@3 JP3.8 R6.2 U5.2 U6.0 U6.8 U6.14 U6.17 U6.20
GND3: C31.2 C32.2 C33.2 C34.2 C35.2 C36.1 C38.1 C39.1 C40.C J$4.GND@0 J$4.GND@1 J$4.GND@2 J$4.GND@3 JP4.8 R8.2 U7.2 U8.0 U8.8 U8.14 U8.17 U8.20
GND4: C41.2 C42.2 C43.2 C44.2 C45.2 C46.1 C48.1 C49.1 C50.C J$5.GND@0 J$5.GND@1 J$5.GND@2 J$5.GND@3 JP5.8 R10.2 U9.2 U10.0 U10.8 U10.14 U10.17 U10.20
GND5: C51.2 C52.2 C53.2 C54.2 C55.2 C56.1 C58.1 C59.1 C60.C J$6.GND@0 J$6.GND@1 J$6.GND@2 J$6.GND@3 JP6.8 R12.2 U11.2 U12.0 U12.8 U12.14 U12.17 U12.20
GND6: C61.2 C62.2 C63.2 C64.2 C65.2 C66.1 C68.1 C69.1 C70.C J$7.GND@0 J$7.GND@1 J$7.GND@2 J$7.GND@3 JP7.8 R14.2 U13.2 U14.0 U14.8 U14.14 U14.17 U14.20
GND7: C71.2 C72.2 C73.2 C74.2 C75.2 C76.1 C78.1 C79.1 C80.C J$8.GND@0 J$8.GND@1 J$8.GND@2 J$8.GND@3 JP8.8 R16.2 U15.2 U16.0 U16.8 U16.14 U16.17 U16.20
GND8: C81.2 C82.2 C83.2 C84.2 C85.2 C86.1 C88.1 C89.1 C90.C J$9.GND@0 J$9.GND@1 J$9.GND@2 J$9.GND@3 JP9.8 R18.2 U17.2 U18.0 U18.8 U18.14 U18.17 U18.20
GND9: C91.2 C92.2 C93.2 C94.2 C95.2 C96.1 C98.1 C99.1 C100.C J$10.GND@0 J$10.GND@1 J$10.GND@2 J$10.GND@3 JP10.8 R20.2 U19.2 U20.0 U20.8 U20.14 U20.17 U20.20
GND10: C101.2 C102.2 C103.2 C104.2 C105.2 C106.1 C108.1 C109.1 C110.C J$11.GND@0 J$11.GND@1 J$11.GND@2 J$11.GND@3 JP11.8 R22.2 U21.2 U22.0 U22.8 U22.14 U22.17 U22.20
GND11: C111.2 C112.2 C113.2 C114.2 C115.2 C116.1 C118.1 C119.1 C120.C J$12.GND@0 J$12.GND@1 J$12.GND@2 J$12.GND@3 JP12.8 R24.2 U23.2 U24.0 U24.8 U24.14 U24.17 U24.20
GND12: C121.2 C122.2 C123.2 C124.2 C125.2 C126.1 C128.1 C129.1 C130.C J$13.GND@0 J$13.GND@1 J$13.GND@2 J$13.GND@3 JP13.8 R26.2 U25.2 U26.0 U26.8 U26.14 U26.17 U26.20
GND13: C131.2 C132.2 C133.2 C134.2 C135.2 C136.1 C138.1 C139.1 C140.C J$14.GND@0 J$14.GND@1 J$14.GND@2 J$14.GND@3 JP14.8 R28.2 U27.2 U28.0 U28.8 U28.14 U28.17 U28.20
GND14: C141.2 C142.2 C143.2 C144.2 C145.2 C146.1 C148.1 C149.1 C150.C J$15.GND@0 J$15.GND@1 J$15.GND@2 J$15.GND@3 JP15.8 R30.2 U29.2 U30.0 U30.8 U30.14 U30.17 U30.20
GND15: C151.2 C152.2 C153.2 C154.2 C155.2 C156.1 C158.1 C159.1 C160.C J$16.GND@0 J$16.GND@1 J$16.GND@2 J$16.GND@3 JP16.8 R32.2 U31.2 U32.0 U32.8 U32.14 U32.17 U32.20
GND16: C161.2 C162.2 C163.2 C164.2 C165.2 C166.1 C168.1 C169.1 C170.C J$17.GND@0 J$17.GND@1 J$17.GND@2 J$17.GND@3 JP17.8 R34.2 U33.2 U34.0 U34.8 U34.14 U34.17 U34.20
GND17: C171.2 C172.2 C173.2 C174.2 C175.2 C176.1 C178.1 C179.1 C180.C J$18.GND@0 J$18.GND@1 J$18.GND@2 J$18.GND@3 JP18.8 R36.2 U35.2 U36.0 U36.8 U36.14 U36.17 U36.20
GND18: C181.2 C182.2 C183.2 C184.2 C185.2 C186.1 C188.1 C189.1 C190.C J$19.GND@0 J$19.GND@1 J$19.GND@2 J$19.GND@3 JP19.8 R38.2 U37.2 U38.0 U38.8 U38.14 U38.17 U38.20
GND19: C191.2 C192.2 C193.2 C194.2 C195.2 C196.1 C198.1 C199.1 C200.C J$20.GND@0 J$20.GND@1 J$20.GND@2 J$20.GND@3 JP20.8 R40.2 U39.2 U40.0 U40.8 U40.14 U40.17 U40.20
IQR: JP1.7 U1.6
IQR1: JP2.7 U4.6
IQR2: JP3.7 U6.6
IQR3: JP4.7 U8.6
IQR4: JP5.7 U10.6
IQR5: JP6.7 U12.6
IQR6: JP7.7 U14.6
IQR7: JP8.7 U16.6
IQR8: JP9.7 U18.6
IQR9: JP10.7 U20.6
IQR10: JP11.7 U22.6
IQR11: JP12.7 U24.6
IQR12: JP13.7 U26.6
IQR13: JP14.7 U28.6
IQR14: JP15.7 U30.6
IQR15: JP16.7 U32.6
IQR16: JP17.7 U34.6
IQR17: JP18.7 U36.6
IQR18: JP19.7 U38.6
IQR19: JP20.7 U40.6
MISO: JP1.6 U1.5
MISO1: JP2.6 U4.5
MISO2: JP3.6 U6.5
MISO3: JP4.6 U8.5
MISO4: JP5.6 U10.5
MISO5: JP6.6 U12.5
MISO6: JP7.6 U14.5
MISO7: JP8.6 U16.5
MISO8: JP9.6 U18.5
MISO9: JP10.6 U20.5
MISO10: JP11.6 U22.5
MISO11: JP12.6 U24.5
MISO12: JP13.6 U26.5
MISO13: JP14.6 U28.5
MISO14: JP15.6 U30.5
MISO15: JP16.6 U32.5
MISO16: JP17.6 U34.5
MISO17: JP18.6 U36.5
MISO18: JP19.6 U38.5
MISO19: JP20.6 U40.5
MOSI: JP1.5 U1.4
MOSI1: JP2.5 U4.4
MOSI2: JP3.5 U6.4
MOSI3: JP4.5 U8.4
MOSI4: JP5.5 U10.4
MOSI5: JP6.5 U12.4
MOSI6: JP7.5 U14.4
MOSI7: JP8.5 U16.4
MOSI8: JP9.5 U18.4
MOSI9: JP10.5 U20.4
MOSI10: JP11.5 U22.4
MOSI11: JP12.5 U24.4
MOSI12: JP13.5 U26.4
MOSI13: JP14.5 U28.4
MOSI14: JP15.5 U30.4
MOSI15: JP16.5 U32.4
MOSI16: JP17.5 U34.4
MOSI17: JP18.5 U36.4
MOSI18: JP19.5 U38.4
MOSI19: JP20.5 U40.4
N$1: C1.1 Q1.1 R1.1 U1.9
N$2: C2.1 Q1.3 R1.2 U1.10
N$3: L2.2 L3.1 U1.12
N$4: R2.1 U1.16
N$5: C3.1 U1.19
N$6: L1.1 L3.2 U1.13
N$7: C4.1 C5.1 L2.1 U1.11
N$8: C11.1 Q2.1 R3.1 U4.9
N$9: C7.1 L1.2
N$10: C12.1 Q2.3 R3.2 U4.10
N$11: L4.1 L6.2 U4.13
N$12: C14.1 C15.1 L5.1 U4.11
N$13: R4.1 U4.16
N$14: C13.1 U4.19
N$15: L5.2 L6.1 U4.12
N$16: C17.1 L4.2
N$17: C21.1 Q3.1 R5.1 U6.9
N$18: C22.1 Q3.3 R5.2 U6.10
N$19: L7.1 L9.2 U6.13
N$20: C24.1 C25.1 L8.1 U6.11
N$21: R6.1 U6.16
N$22: C23.1 U6.19
N$23: L8.2 L9.1 U6.12
N$24: C27.1 L7.2
N$25: C31.1 Q4.1 R7.1 U8.9
N$26: C32.1 Q4.3 R7.2 U8.10
N$27: L10.1 L12.2 U8.13
N$28: C34.1 C35.1 L11.1 U8.11
N$29: R8.1 U8.16
N$30: C33.1 U8.19
N$31: L11.2 L12.1 U8.12
N$32: C37.1 L10.2
N$33: C41.1 Q5.1 R9.1 U10.9
N$34: C42.1 Q5.3 R9.2 U10.10
N$35: L13.1 L15.2 U10.13
N$36: C44.1 C45.1 L14.1 U10.11
N$37: R10.1 U10.16
N$38: C43.1 U10.19
N$39: L14.2 L15.1 U10.12
N$40: C47.1 L13.2
N$41: C51.1 Q6.1 R11.1 U12.9
N$42: C52.1 Q6.3 R11.2 U12.10
N$43: L16.1 L18.2 U12.13
N$44: C54.1 C55.1 L17.1 U12.11
N$45: R12.1 U12.16
N$46: C53.1 U12.19
N$47: L17.2 L18.1 U12.12
N$48: C57.1 L16.2
N$49: C61.1 Q7.1 R13.1 U14.9
N$50: C62.1 Q7.3 R13.2 U14.10
N$51: L19.1 L21.2 U14.13
N$52: C64.1 C65.1 L20.1 U14.11
N$53: R14.1 U14.16
N$54: C63.1 U14.19
N$55: L20.2 L21.1 U14.12
N$56: C67.1 L19.2
N$57: C71.1 Q8.1 R15.1 U16.9
N$58: C72.1 Q8.3 R15.2 U16.10
N$59: L22.1 L24.2 U16.13
N$60: C74.1 C75.1 L23.1 U16.11
N$61: R16.1 U16.16
N$62: C73.1 U16.19
N$63: L23.2 L24.1 U16.12
N$64: C77.1 L22.2
N$65: C81.1 Q9.1 R17.1 U18.9
N$66: C82.1 Q9.3 R17.2 U18.10
N$67: L25.1 L27.2 U18.13
N$68: C84.1 C85.1 L26.1 U18.11
N$69: R18.1 U18.16
N$70: C83.1 U18.19
N$71: L26.2 L27.1 U18.12
N$72: C87.1 L25.2
N$73: C91.1 Q10.1 R19.1 U20.9
N$74: C92.1 Q10.3 R19.2 U20.10
N$75: L28.1 L30.2 U20.13
N$76: C94.1 C95.1 L29.1 U20.11
N$77: R20.1 U20.16
N$78: C93.1 U20.19
N$79: L29.2 L30.1 U20.12
N$80: C97.1 L28.2
N$81: C101.1 Q11.1 R21.1 U22.9
N$82: C102.1 Q11.3 R21.2 U22.10
N$83: L31.1 L33.2 U22.13
N$84: C104.1 C105.1 L32.1 U22.11
N$85: R22.1 U22.16
N$86: C103.1 U22.19
N$87: L32.2 L33.1 U22.12
N$88: C107.1 L31.2
N$89: C111.1 Q12.1 R23.1 U24.9
N$90: C112.1 Q12.3 R23.2 U24.10
N$91: L34.1 L36.2 U24.13
N$92: C114.1 C115.1 L35.1 U24.11
N$93: R24.1 U24.16
N$94: C113.1 U24.19
N$95: L35.2 L36.1 U24.12
N$96: C117.1 L34.2
N$97: C121.1 Q13.1 R25.1 U26.9
N$98: C122.1 Q13.3 R25.2 U26.10
N$99: L37.1 L39.2 U26.13
N$100: C124.1 C125.1 L38.1 U26.11
N$101: R26.1 U26.16
N$102: C123.1 U26.19
N$103: L38.2 L39.1 U26.12
N$104: C127.1 L37.2
N$105: C131.1 Q14.1 R27.1 U28.9
N$106: C132.1 Q14.3 R27.2 U28.10
N$107: L40.1 L42.2 U28.13
N$108: C134.1 C135.1 L41.1 U28.11
N$109: R28.1 U28.16
N$110: C133.1 U28.19
N$111: L41.2 L42.1 U28.12
N$112: C137.1 L40.2
N$113: C141.1 Q15.1 R29.1 U30.9
N$114: C142.1 Q15.3 R29.2 U30.10
N$115: L43.1 L45.2 U30.13
N$116: C144.1 C145.1 L44.1 U30.11
N$117: R30.1 U30.16
N$118: C143.1 U30.19
N$119: L44.2 L45.1 U30.12
N$120: C147.1 L43.2
N$121: C151.1 Q16.1 R31.1 U32.9
N$122: C152.1 Q16.3 R31.2 U32.10
N$123: L46.1 L48.2 U32.13
N$124: C154.1 C155.1 L47.1 U32.11
N$125: R32.1 U32.16
N$126: C153.1 U32.19
N$127: L47.2 L48.1 U32.12
N$128: C157.1 L46.2
N$129: C161.1 Q17.1 R33.1 U34.9
N$130: C162.1 Q17.3 R33.2 U34.10
N$131: L49.1 L51.2 U34.13
N$132: C164.1 C165.1 L50.1 U34.11
N$133: R34.1 U34.16
N$134: C163.1 U34.19
N$135: L50.2 L51.1 U34.12
N$136: C167.1 L49.2
N$137: C171.1 Q18.1 R35.1 U36.9
N$138: C172.1 Q18.3 R35.2 U36.10
N$139: L52.1 L54.2 U36.13
N$140: C174.1 C175.1 L53.1 U36.11
N$141: R36.1 U36.16
N$142: C173.1 U36.19
N$143: L53.2 L54.1 U36.12
N$144: C177.1 L52.2
N$145: C181.1 Q19.1 R37.1 U38.9
N$146: C182.1 Q19.3 R37.2 U38.10
N$147: L55.1 L57.2 U38.13
N$148: C184.1 C185.1 L56.1 U38.11
N$149: R38.1 U38.16
N$150: C183.1 U38.19
N$151: L56.2 L57.1 U38.12
N$152: C187.1 L55.2
N$153: C191.1 Q20.1 R39.1 U40.9
N$154: C192.1 Q20.3 R39.2 U40.10
N$155: L58.1 L60.2 U40.13
N$156: C194.1 C195.1 L59.1 U40.11
N$157: R40.1 U40.16
N$158: C193.1 U40.19
N$159: L59.2 L60.1 U40.12
N$160: C197.1 L58.2
RAW: JP1.1 U2.1 U2.3
RAW1: JP2.1 U3.1 U3.3
RAW2: JP3.1 U5.1 U5.3
RAW3: JP4.1 U7.1 U7.3
RAW4: JP5.1 U9.1 U9.3
RAW5: JP6.1 U11.1 U11.3
RAW6: JP7.1 U13.1 U13.3
RAW7: JP8.1 U15.1 U15.3
RAW8: JP9.1 U17.1 U17.3
RAW9: JP10.1 U19.1 U19.3
RAW10: JP11.1 U21.1 U21.3
RAW11: JP12.1 U23.1 U23.3
RAW12: JP13.1 U25.1 U25.3
RAW13: JP14.1 U27.1 U27.3
RAW14: JP15.1 U29.1 U29.3
RAW15: JP16.1 U31.1 U31.3
RAW16: JP17.1 U33.1 U33.3
RAW17: JP18.1 U35.1 U35.3
RAW18: JP19.1 U37.1 U37.3
RAW19: JP20.1 U39.1 U39.3
SCK: JP1.4 U1.3
SCK1: JP2.4 U4.3
SCK2: JP3.4 U6.3
SCK3: JP4.4 U8.3
SCK4: JP5.4 U10.3
SCK5: JP6.4 U12.3
SCK6: JP7.4 U14.3
SCK7: JP8.4 U16.3
SCK8: JP9.4 U18.3
SCK9: JP10.4 U20.3
SCK10: JP11.4 U22.3
SCK11: JP12.4 U24.3
SCK12: JP13.4 U26.3
SCK13: JP14.4 U28.3
SCK14: JP15.4 U30.3
SCK15: JP16.4 U32.3
SCK16: JP17.4 U34.3
SCK17: JP18.4 U36.3
SCK18: JP19.4 U38.3
SCK19: JP20.4 U40.3
VCC: C8.2 C9.2 C10.A U1.7 U1.15 U1.18 U2.5
VCC1: C18.2 C19.2 C20.A U3.5 U4.7 U4.15 U4.18
VCC2: C28.2 C29.2 C30.A U5.5 U6.7 U6.15 U6.18
VCC3: C38.2 C39.2 C40.A U7.5 U8.7 U8.15 U8.18
VCC4: C48.2 C49.2 C50.A U9.5 U10.7 U10.15 U10.18
VCC5: C58.2 C59.2 C60.A U11.5 U12.7 U12.15 U12.18
VCC6: C68.2 C69.2 C70.A U13.5 U14.7 U14.15 U14.18
VCC7: C78.2 C79.2 C80.A U15.5 U16.7 U16.15 U16.18
VCC8: C88.2 C89.2 C90.A U17.5 U18.7 U18.15 U18.18
VCC9: C98.2 C99.2 C100.A U19.5 U20.7 U20.15 U20.18
VCC10: C108.2 C109.2 C110.A U21.5 U22.7 U22.15 U22.18
VCC11: C118.2 C119.2 C120.A U23.5 U24.7 U24.15 U24.18
VCC12: C128.2 C129.2 C130.A U25.5 U26.7 U26.15 U26.18
VCC13: C138.2 C139.2 C140.A U27.5 U28.7 U28.15 U28.18
VCC14: C148.2 C149.2 C150.A U29.5 U30.7 U30.15 U30.18
VCC15: C158.2 C159.2 C160.A U31.5 U32.7 U32.15 U32.18
VCC16: C168.2 C169.2 C170.A U33.5 U34.7 U34.15 U34.18
VCC17: C178.2 C179.2 C180.A U35.5 U36.7 U36.15 U36.18
VCC18: C188.2 C189.2 C190.A U37.5 U38.7 U38.15 U38.18
VCC19: C198.2 C199.2 C200.A U39.5 U40.7 U40.15 U40.18

## Tracks (layer width: path | path; a pad name or v marks a point on that pad's centre or on a via)
ANT
  Top 0.254: J$1.SIG | J$1.SIG | C7.2 17.02,20.19 17,20.21
  Top 0.406: C7.2 J$1.SIG | C6.2 17,20.21
ANT1
  Top 0.254: J$2.SIG | J$2.SIG | C17.2 37.85,20.19 37.83,20.21
  Top 0.406: C17.2 J$2.SIG | C16.2 37.83,20.21
ANT2
  Top 0.254: J$3.SIG | J$3.SIG | C27.2 58.67,20.19 58.66,20.21
  Top 0.406: C27.2 J$3.SIG | C26.2 58.66,20.21
ANT3
  Top 0.254: J$4.SIG | J$4.SIG | C37.2 79.5,20.19 79.49,20.21
  Top 0.406: C37.2 J$4.SIG | C36.2 79.49,20.21
ANT4
  Top 0.254: J$5.SIG | J$5.SIG | C47.2 100.33,20.19 100.31,20.21
  Top 0.406: C47.2 J$5.SIG | C46.2 100.31,20.21
ANT5
  Top 0.254: J$6.SIG | J$6.SIG | C57.2 17.02,51.94 17,51.96
  Top 0.406: C57.2 J$6.SIG | C56.2 17,51.96
ANT6
  Top 0.254: J$7.SIG | J$7.SIG | C67.2 37.85,51.94 37.83,51.96
  Top 0.406: C67.2 J$7.SIG | C66.2 37.83,51.96
ANT7
  Top 0.254: J$8.SIG | J$8.SIG | C77.2 58.67,51.94 58.66,51.96
  Top 0.406: C77.2 J$8.SIG | C76.2 58.66,51.96
ANT8
  Top 0.254: J$9.SIG | J$9.SIG | C87.2 79.5,51.94 79.49,51.96
  Top 0.406: C87.2 J$9.SIG | C86.2 79.49,51.96
ANT9
  Top 0.254: J$10.SIG | J$10.SIG | C97.2 100.33,51.94 100.31,51.96
  Top 0.406: C97.2 J$10.SIG | C96.2 100.31,51.96
ANT10
  Top 0.254: J$11.SIG | J$11.SIG | C107.2 17.02,83.69 17,83.71
  Top 0.406: C107.2 J$11.SIG | C106.2 17,83.71
ANT11
  Top 0.254: J$12.SIG | J$12.SIG | C117.2 37.85,83.69 37.83,83.71
  Top 0.406: C117.2 J$12.SIG | C116.2 37.83,83.71
ANT12
  Top 0.254: J$13.SIG | J$13.SIG | C127.2 58.67,83.69 58.66,83.71
  Top 0.406: C127.2 J$13.SIG | C126.2 58.66,83.71
ANT13
  Top 0.254: J$14.SIG | J$14.SIG | C137.2 79.5,83.69 79.49,83.71
  Top 0.406: C137.2 J$14.SIG | C136.2 79.49,83.71
ANT14
  Top 0.254: J$15.SIG | J$15.SIG | C147.2 100.33,83.69 100.31,83.71
  Top 0.406: C147.2 J$15.SIG | C146.2 100.31,83.71
ANT15
  Top 0.254: J$16.SIG | J$16.SIG | C157.2 17.02,115.44 17,115.46
  Top 0.406: C157.2 J$16.SIG | C156.2 17,115.46
ANT16
  Top 0.254: J$17.SIG | J$17.SIG | C167.2 37.85,115.44 37.83,115.46
  Top 0.406: C167.2 J$17.SIG | C166.2 37.83,115.46
ANT17
  Top 0.254: J$18.SIG | J$18.SIG | C177.2 58.67,115.44 58.66,115.46
  Top 0.406: C177.2 J$18.SIG | C176.2 58.66,115.46
ANT18
  Top 0.254: J$19.SIG | J$19.SIG | C187.2 79.5,115.44 79.49,115.46
  Top 0.406: C187.2 J$19.SIG | C186.2 79.49,115.46
ANT19
  Top 0.254: J$20.SIG | J$20.SIG | C197.2 100.33,115.44 100.31,115.46
  Top 0.406: C197.2 J$20.SIG | C196.2 100.31,115.46
CE
  Top 0.254: JP1.2 11.43,8.13 13.21,9.91 15.24,9.91 15.75,10.41 15.76,10.43 16.02,10.68 U1.1
CE1
  Top 0.254: JP2.2 32.26,8.13 34.04,9.91 36.07,9.91 36.58,10.41 36.59,10.43 36.85,10.68 U4.1
CE2
  Top 0.254: JP3.2 53.09,8.13 54.86,9.91 56.9,9.91 57.4,10.41 57.42,10.43 57.67,10.68 U6.1
CE3
  Top 0.254: JP4.2 73.91,8.13 75.69,9.91 77.72,9.91 78.23,10.41 78.25,10.43 78.5,10.68 U8.1
CE4
  Top 0.254: JP5.2 94.74,8.13 96.52,9.91 98.55,9.91 99.06,10.41 99.08,10.43 99.33,10.68 U10.1
CE5
  Top 0.254: JP6.2 11.43,39.88 13.21,41.66 15.24,41.66 15.75,42.16 15.76,42.18 16.02,42.43 U12.1
CE6
  Top 0.254: JP7.2 32.26,39.88 34.04,41.66 36.07,41.66 36.58,42.16 36.59,42.18 36.85,42.43 U14.1
CE7
  Top 0.254: JP8.2 53.09,39.88 54.86,41.66 56.9,41.66 57.4,42.16 57.42,42.18 57.67,42.43 U16.1
CE8
  Top 0.254: JP9.2 73.91,39.88 75.69,41.66 77.72,41.66 78.23,42.16 78.25,42.18 78.5,42.43 U18.1
CE9
  Top 0.254: JP10.2 94.74,39.88 96.52,41.66 98.55,41.66 99.06,42.16 99.08,42.18 99.33,42.43 U20.1
CE10
  Top 0.254: JP11.2 11.43,71.63 13.21,73.41 15.24,73.41 15.75,73.91 15.76,73.93 16.02,74.18 U22.1
CE11
  Top 0.254: JP12.2 32.26,71.63 34.04,73.41 36.07,73.41 36.58,73.91 36.59,73.93 36.85,74.18 U24.1
CE12
  Top 0.254: JP13.2 53.09,71.63 54.86,73.41 56.9,73.41 57.4,73.91 57.42,73.93 57.67,74.18 U26.1
CE13
  Top 0.254: JP14.2 73.91,71.63 75.69,73.41 77.72,73.41 78.23,73.91 78.25,73.93 78.5,74.18 U28.1
CE14
  Top 0.254: JP15.2 94.74,71.63 96.52,73.41 98.55,73.41 99.06,73.91 99.08,73.93 99.33,74.18 U30.1
CE15
  Top 0.254: JP16.2 11.43,103.38 13.21,105.16 15.24,105.16 15.75,105.66 15.76,105.68 16.02,105.93 U32.1
CE16
  Top 0.254: JP17.2 32.26,103.38 34.04,105.16 36.07,105.16 36.58,105.66 36.59,105.68 36.85,105.93 U34.1
CE17
  Top 0.254: JP18.2 53.09,103.38 54.86,105.16 56.9,105.16 57.4,105.66 57.42,105.68 57.67,105.93 U36.1
CE18
  Top 0.254: JP19.2 73.91,103.38 75.69,105.16 77.72,105.16 78.23,105.66 78.25,105.68 78.5,105.93 U38.1
CE19
  Top 0.254: JP20.2 94.74,103.38 96.52,105.16 98.55,105.16 99.06,105.66 99.08,105.68 99.33,105.93 U40.1
CSN
  Top 0.254: JP1.3 14.48,9.4 15.75,9.4 16.26,9.91 16.52,10.17 U1.2
CSN1
  Top 0.254: JP2.3 35.31,9.4 36.58,9.4 37.08,9.91 37.09,9.91 37.35,10.17 U4.2
CSN2
  Top 0.254: JP3.3 56.13,9.4 57.4,9.4 57.91,9.91 57.92,9.91 58.17,10.17 U6.2
CSN3
  Top 0.254: JP4.3 76.96,9.4 78.23,9.4 78.74,9.91 78.75,9.91 79,10.17 U8.2
CSN4
  Top 0.254: JP5.3 97.79,9.4 99.06,9.4 99.57,9.91 99.58,9.91 99.83,10.17 U10.2
CSN5
  Top 0.254: JP6.3 14.48,41.15 15.75,41.15 16.26,41.66 16.52,41.92 U12.2
CSN6
  Top 0.254: JP7.3 35.31,41.15 36.58,41.15 37.08,41.66 37.09,41.66 37.35,41.92 U14.2
CSN7
  Top 0.254: JP8.3 56.13,41.15 57.4,41.15 57.91,41.66 57.92,41.66 58.17,41.92 U16.2
CSN8
  Top 0.254: JP9.3 76.96,41.15 78.23,41.15 78.74,41.66 78.75,41.66 79,41.92 U18.2
CSN9
  Top 0.254: JP10.3 97.79,41.15 99.06,41.15 99.57,41.66 99.58,41.66 99.83,41.92 U20.2
CSN10
  Top 0.254: JP11.3 14.48,72.9 15.75,72.9 16.26,73.41 16.52,73.67 U22.2
CSN11
  Top 0.254: JP12.3 35.31,72.9 36.58,72.9 37.08,73.41 37.09,73.41 37.35,73.67 U24.2
CSN12
  Top 0.254: JP13.3 56.13,72.9 57.4,72.9 57.91,73.41 57.92,73.41 58.17,73.67 U26.2
CSN13
  Top 0.254: JP14.3 76.96,72.9 78.23,72.9 78.74,73.41 78.75,73.41 79,73.67 U28.2
CSN14
  Top 0.254: JP15.3 97.79,72.9 99.06,72.9 99.57,73.41 99.58,73.41 99.83,73.67 U30.2
CSN15
  Top 0.254: JP16.3 14.48,104.65 15.75,104.65 16.26,105.16 16.52,105.42 U32.2
CSN16
  Top 0.254: JP17.3 35.31,104.65 36.58,104.65 37.08,105.16 37.09,105.16 37.35,105.42 U34.2
CSN17
  Top 0.254: JP18.3 56.13,104.65 57.4,104.65 57.91,105.16 57.92,105.16 58.17,105.42 U36.2
CSN18
  Top 0.254: JP19.3 76.96,104.65 78.23,104.65 78.74,105.16 78.75,105.16 79,105.42 U38.2
CSN19
  Top 0.254: JP20.3 97.79,104.65 99.06,104.65 99.57,105.16 99.58,105.16 99.83,105.42 U40.2
GND  (via drill 0.51)
  Top 0.203: 14.99,13.72 14.98,13.71 U1.17 | 14.99,12.19 14.97,12.21 U1.20
  Top 0.254: 13.21,11.3 13.19,11.29 C9.1 11.94,11.3 11.3,11.3 10.92,11.68 9.65,11.68 9.4,11.43 U2.2 | U1.20 14.62,12.21 13.72,11.3 13.21,11.3 | 13.21,11.3 C3.2 | C4.2 24,17.02 24.02,17.03 C5.2 | R2.2 13.21,15.11 14.61,13.71 14.98,13.71 | U1.17 16.52,13.71 | 16.52,13.71 U1.0 | 16.52,13.71 16.53,13.71 16.54,13.72 16.52,13.73 U1.14 | U1.0 U1.8 | U1.0 16.99,13.18
  other vias: 11.94,10.03 11.94,14.48 17.02,13.21 7.87,25.02 10.41,25.02 12.95,25.02 12.95,20.07 21.08,25.02 23.62,25.02 26.16,25.02 23.62,20.07 26.16,20.07 25.88,16.43 7.87,22.61 10.41,22.61 12.95,22.61 21.08,22.61 23.62,22.61 26.16,22.61 7.87,20.07 10.41,20.07 21.08,20.07 14.22,18.29
  pour Bottom (isolate 0.305): 6.86,6.86 27.18,6.86 27.18,25.91 6.86,25.91
  pour Top (isolate 0.305): 6.86,6.86 27.18,6.86 27.18,25.91 6.86,25.91
GND1  (via drill 0.51)
  Top 0.203: 35.81,13.72 35.81,13.71 U4.17 | 35.81,12.19 35.8,12.21 U4.20
  Top 0.254: 34.04,11.3 34.02,11.29 C19.1 32.77,11.3 32.13,11.3 31.75,11.68 30.48,11.68 30.23,11.43 U3.2 | U4.20 35.45,12.21 34.54,11.3 34.04,11.3 | 34.04,11.3 C13.2 | C14.2 44.83,17.02 44.85,17.03 C15.2 | R4.2 34.04,15.11 35.44,13.71 35.81,13.71 | U4.17 37.35,13.71 | 37.35,13.71 U4.0 | 37.35,13.71 37.36,13.72 37.35,13.73 U4.14 | U4.0 U4.8 | U4.0 37.82,13.18
  other vias: 32.77,10.03 32.77,14.48 37.85,13.21 28.7,25.02 31.24,25.02 33.78,25.02 33.78,20.07 41.91,25.02 44.45,25.02 46.99,25.02 44.45,20.07 46.99,20.07 46.71,16.43 28.7,22.61 31.24,22.61 33.78,22.61 41.91,22.61 44.45,22.61 46.99,22.61 28.7,20.07 31.24,20.07 41.91,20.07 35.05,18.29
  pour Bottom (isolate 0.305): 27.69,6.86 48.01,6.86 48.01,25.91 27.69,25.91
  pour Top (isolate 0.305): 27.69,6.86 48.01,6.86 48.01,25.91 27.69,25.91
GND2  (via drill 0.51)
  Top 0.203: 56.64,13.72 56.63,13.71 U6.17 | 56.64,12.19 56.62,12.21 U6.20
  Top 0.254: 54.86,11.3 54.85,11.29 C29.1 53.59,11.3 52.96,11.3 52.58,11.68 51.31,11.68 51.05,11.43 U5.2 | U6.20 56.28,12.21 55.37,11.3 54.86,11.3 | 54.86,11.3 C23.2 | C24.2 65.67,17.03 C25.2 | R6.2 54.86,15.11 56.27,13.71 56.63,13.71 | U6.17 58.17,13.71 | 58.17,13.71 U6.0 | 58.17,13.71 58.18,13.71 58.19,13.72 58.17,13.73 U6.14 | U6.0 U6.8 | U6.0 58.65,13.18
  other vias: 53.59,10.03 53.59,14.48 58.67,13.21 49.53,25.02 52.07,25.02 54.61,25.02 54.61,20.07 62.74,25.02 65.28,25.02 67.82,25.02 65.28,20.07 67.82,20.07 67.54,16.43 49.53,22.61 52.07,22.61 54.61,22.61 62.74,22.61 65.28,22.61 67.82,22.61 49.53,20.07 52.07,20.07 62.74,20.07 55.88,18.29
  pour Bottom (isolate 0.305): 48.51,6.86 68.83,6.86 68.83,25.91 48.51,25.91
  pour Top (isolate 0.305): 48.51,6.86 68.83,6.86 68.83,25.91 48.51,25.91
GND3  (via drill 0.51)
  Top 0.203: 77.47,13.72 77.46,13.71 U8.17 | 77.47,12.19 77.45,12.21 U8.20
  Top 0.254: 75.69,11.3 75.68,11.29 C39.1 74.42,11.3 73.79,11.3 73.41,11.68 72.14,11.68 71.88,11.43 U7.2 | U8.20 77.11,12.21 76.2,11.3 75.69,11.3 | 75.69,11.3 C33.2 | C34.2 86.49,17.02 86.5,17.03 C35.2 | R8.2 75.69,15.11 77.1,13.71 77.46,13.71 | U8.17 79,13.71 | 79,13.71 U8.0 | 79,13.71 79.01,13.71 79.02,13.72 79,13.73 U8.14 | U8.0 U8.8 | U8.0 79.48,13.18
  other vias: 74.42,10.03 74.42,14.48 79.5,13.21 70.36,25.02 72.9,25.02 75.44,25.02 75.44,20.07 83.57,25.02 86.11,25.02 88.65,25.02 86.11,20.07 88.65,20.07 88.37,16.43 70.36,22.61 72.9,22.61 75.44,22.61 83.57,22.61 86.11,22.61 88.65,22.61 70.36,20.07 72.9,20.07 83.57,20.07 76.71,18.29
  pour Bottom (isolate 0.305): 69.34,6.86 89.66,6.86 89.66,25.91 69.34,25.91
  pour Top (isolate 0.305): 69.34,6.86 89.66,6.86 89.66,25.91 69.34,25.91
GND4  (via drill 0.51)
  Top 0.203: 98.3,13.72 98.29,13.71 U10.17 | 98.3,12.19 98.28,12.21 U10.20
  Top 0.254: 96.52,11.3 96.5,11.29 C49.1 95.25,11.3 94.61,11.3 94.23,11.68 92.96,11.68 92.71,11.43 U9.2 | U10.20 97.93,12.21 97.03,11.3 96.52,11.3 | 96.52,11.3 C43.2 | C44.2 107.31,17.02 107.33,17.03 C45.2 | R10.2 96.52,15.11 97.92,13.71 98.29,13.71 | U10.17 99.83,13.71 | 99.83,13.71 U10.0 | 99.83,13.71 99.84,13.71 99.85,13.72 99.83,13.73 U10.14 | U10.0 U10.8 | U10.0 100.31,13.18
  other vias: 95.25,10.03 95.25,14.48 100.33,13.21 91.19,25.02 93.73,25.02 96.27,25.02 96.27,20.07 104.39,25.02 106.93,25.02 109.47,25.02 106.93,20.07 109.47,20.07 109.19,16.43 91.19,22.61 93.73,22.61 96.27,22.61 104.39,22.61 106.93,22.61 109.47,22.61 91.19,20.07 93.73,20.07 104.39,20.07 97.54,18.29
  pour Bottom (isolate 0.305): 90.17,6.86 110.49,6.86 110.49,25.91 90.17,25.91
  pour Top (isolate 0.305): 90.17,6.86 110.49,6.86 110.49,25.91 90.17,25.91
GND5  (via drill 0.51)
  Top 0.203: 14.99,45.47 14.98,45.46 U12.17 | 14.99,43.94 14.97,43.96 U12.20
  Top 0.254: 13.21,43.05 13.19,43.04 C59.1 11.94,43.05 11.3,43.05 10.92,43.43 9.65,43.43 9.4,43.18 U11.2 | U12.20 14.62,43.96 13.72,43.05 13.21,43.05 | 13.21,43.05 C53.2 | C54.2 24,48.77 24.02,48.78 C55.2 | R12.2 13.21,46.86 14.61,45.46 14.98,45.46 | U12.17 16.52,45.46 | 16.52,45.46 U12.0 | 16.52,45.46 16.53,45.46 16.54,45.47 16.52,45.48 U12.14 | U12.0 U12.8 | U12.0 16.99,44.93
  other vias: 11.94,41.78 11.94,46.23 17.02,44.96 7.87,56.77 10.41,56.77 12.95,56.77 12.95,51.82 21.08,56.77 23.62,56.77 26.16,56.77 23.62,51.82 26.16,51.82 25.88,48.18 7.87,54.36 10.41,54.36 12.95,54.36 21.08,54.36 23.62,54.36 26.16,54.36 7.87,51.82 10.41,51.82 21.08,51.82 14.22,50.04
  pour Bottom (isolate 0.305): 6.86,38.61 27.18,38.61 27.18,57.66 6.86,57.66
  pour Top (isolate 0.305): 6.86,38.61 27.18,38.61 27.18,57.66 6.86,57.66
GND6  (via drill 0.51)
  Top 0.203: 35.81,45.47 35.81,45.46 U14.17 | 35.81,43.94 35.8,43.96 U14.20
  Top 0.254: 34.04,43.05 34.02,43.04 C69.1 32.77,43.05 32.13,43.05 31.75,43.43 30.48,43.43 30.23,43.18 U13.2 | U14.20 35.45,43.96 34.54,43.05 34.04,43.05 | 34.04,43.05 C63.2 | C64.2 44.83,48.77 44.85,48.78 C65.2 | R14.2 34.04,46.86 35.44,45.46 35.81,45.46 | U14.17 37.35,45.46 | 37.35,45.46 U14.0 | 37.35,45.46 37.36,45.47 37.35,45.48 U14.14 | U14.0 U14.8 | U14.0 37.82,44.93
  other vias: 32.77,41.78 32.77,46.23 37.85,44.96 28.7,56.77 31.24,56.77 33.78,56.77 33.78,51.82 41.91,56.77 44.45,56.77 46.99,56.77 44.45,51.82 46.99,51.82 46.71,48.18 28.7,54.36 31.24,54.36 33.78,54.36 41.91,54.36 44.45,54.36 46.99,54.36 28.7,51.82 31.24,51.82 41.91,51.82 35.05,50.04
  pour Bottom (isolate 0.305): 27.69,38.61 48.01,38.61 48.01,57.66 27.69,57.66
  pour Top (isolate 0.305): 27.69,38.61 48.01,38.61 48.01,57.66 27.69,57.66
GND7  (via drill 0.51)
  Top 0.203: 56.64,45.47 56.63,45.46 U16.17 | 56.64,43.94 56.62,43.96 U16.20
  Top 0.254: 54.86,43.05 54.85,43.04 C79.1 53.59,43.05 52.96,43.05 52.58,43.43 51.31,43.43 51.05,43.18 U15.2 | U16.20 56.28,43.96 55.37,43.05 54.86,43.05 | 54.86,43.05 C73.2 | C74.2 65.67,48.78 C75.2 | R16.2 54.86,46.86 56.27,45.46 56.63,45.46 | U16.17 58.17,45.46 | 58.17,45.46 U16.0 | 58.17,45.46 58.18,45.46 58.19,45.47 58.17,45.48 U16.14 | U16.0 U16.8 | U16.0 58.65,44.93
  other vias: 53.59,41.78 53.59,46.23 58.67,44.96 49.53,56.77 52.07,56.77 54.61,56.77 54.61,51.82 62.74,56.77 65.28,56.77 67.82,56.77 65.28,51.82 67.82,51.82 67.54,48.18 49.53,54.36 52.07,54.36 54.61,54.36 62.74,54.36 65.28,54.36 67.82,54.36 49.53,51.82 52.07,51.82 62.74,51.82 55.88,50.04
  pour Bottom (isolate 0.305): 48.51,38.61 68.83,38.61 68.83,57.66 48.51,57.66
  pour Top (isolate 0.305): 48.51,38.61 68.83,38.61 68.83,57.66 48.51,57.66
GND8  (via drill 0.51)
  Top 0.203: 77.47,45.47 77.46,45.46 U18.17 | 77.47,43.94 77.45,43.96 U18.20
  Top 0.254: 75.69,43.05 75.68,43.04 C89.1 74.42,43.05 73.79,43.05 73.41,43.43 72.14,43.43 71.88,43.18 U17.2 | U18.20 77.11,43.96 76.2,43.05 75.69,43.05 | 75.69,43.05 C83.2 | C84.2 86.49,48.77 86.5,48.78 C85.2 | R18.2 75.69,46.86 77.1,45.46 77.46,45.46 | U18.17 79,45.46 | 79,45.46 U18.0 | 79,45.46 79.01,45.46 79.02,45.47 79,45.48 U18.14 | U18.0 U18.8 | U18.0 79.48,44.93
  other vias: 74.42,41.78 74.42,46.23 79.5,44.96 70.36,56.77 72.9,56.77 75.44,56.77 75.44,51.82 83.57,56.77 86.11,56.77 88.65,56.77 86.11,51.82 88.65,51.82 88.37,48.18 70.36,54.36 72.9,54.36 75.44,54.36 83.57,54.36 86.11,54.36 88.65,54.36 70.36,51.82 72.9,51.82 83.57,51.82 76.71,50.04
  pour Bottom (isolate 0.305): 69.34,38.61 89.66,38.61 89.66,57.66 69.34,57.66
  pour Top (isolate 0.305): 69.34,38.61 89.66,38.61 89.66,57.66 69.34,57.66
GND9  (via drill 0.51)
  Top 0.203: 98.3,45.47 98.29,45.46 U20.17 | 98.3,43.94 98.28,43.96 U20.20
  Top 0.254: 96.52,43.05 96.5,43.04 C99.1 95.25,43.05 94.61,43.05 94.23,43.43 92.96,43.43 92.71,43.18 U19.2 | U20.20 97.93,43.96 97.03,43.05 96.52,43.05 | 96.52,43.05 C93.2 | C94.2 107.31,48.77 107.33,48.78 C95.2 | R20.2 96.52,46.86 97.92,45.46 98.29,45.46 | U20.17 99.83,45.46 | 99.83,45.46 U20.0 | 99.83,45.46 99.84,45.46 99.85,45.47 99.83,45.48 U20.14 | U20.0 U20.8 | U20.0 100.31,44.93
  other vias: 95.25,41.78 95.25,46.23 100.33,44.96 91.19,56.77 93.73,56.77 96.27,56.77 96.27,51.82 104.39,56.77 106.93,56.77 109.47,56.77 106.93,51.82 109.47,51.82 109.19,48.18 91.19,54.36 93.73,54.36 96.27,54.36 104.39,54.36 106.93,54.36 109.47,54.36 91.19,51.82 93.73,51.82 104.39,51.82 97.54,50.04
  pour Bottom (isolate 0.305): 90.17,38.61 110.49,38.61 110.49,57.66 90.17,57.66
  pour Top (isolate 0.305): 90.17,38.61 110.49,38.61 110.49,57.66 90.17,57.66
GND10  (via drill 0.51)
  Top 0.203: 14.99,77.22 14.98,77.21 U22.17 | 14.99,75.69 14.97,75.71 U22.20
  Top 0.254: 13.21,74.8 13.19,74.79 C109.1 11.94,74.8 11.3,74.8 10.92,75.18 9.65,75.18 9.4,74.93 U21.2 | U22.20 14.62,75.71 13.72,74.8 13.21,74.8 | 13.21,74.8 C103.2 | C104.2 24,80.52 24.02,80.53 C105.2 | R22.2 13.21,78.61 14.61,77.21 14.98,77.21 | U22.17 16.52,77.21 | 16.52,77.21 U22.0 | 16.52,77.21 16.53,77.21 16.54,77.22 16.52,77.23 U22.14 | U22.0 U22.8 | U22.0 16.99,76.68
  other vias: 11.94,73.53 11.94,77.98 17.02,76.71 7.87,88.52 10.41,88.52 12.95,88.52 12.95,83.57 21.08,88.52 23.62,88.52 26.16,88.52 23.62,83.57 26.16,83.57 25.88,79.93 7.87,86.11 10.41,86.11 12.95,86.11 21.08,86.11 23.62,86.11 26.16,86.11 7.87,83.57 10.41,83.57 21.08,83.57 14.22,81.79